# Altium PCB zulu_a7.PcbDoc (part 1 of 3)
Units mm, origin at the board's own origin, x right, y up, seen from the top; angles counter-clockwise.
Board outline 69.85 x 25.4 mm, 6 copper layers (Top Layer, L2-GND, L3-SIG, L4-SIG, L5-VCC3V3, Bottom Layer), stack 1.65 mm thick; 178 components, 177 nets, 839 pads, 377 vias.
Unrouted connection lines stored in the file: 262.
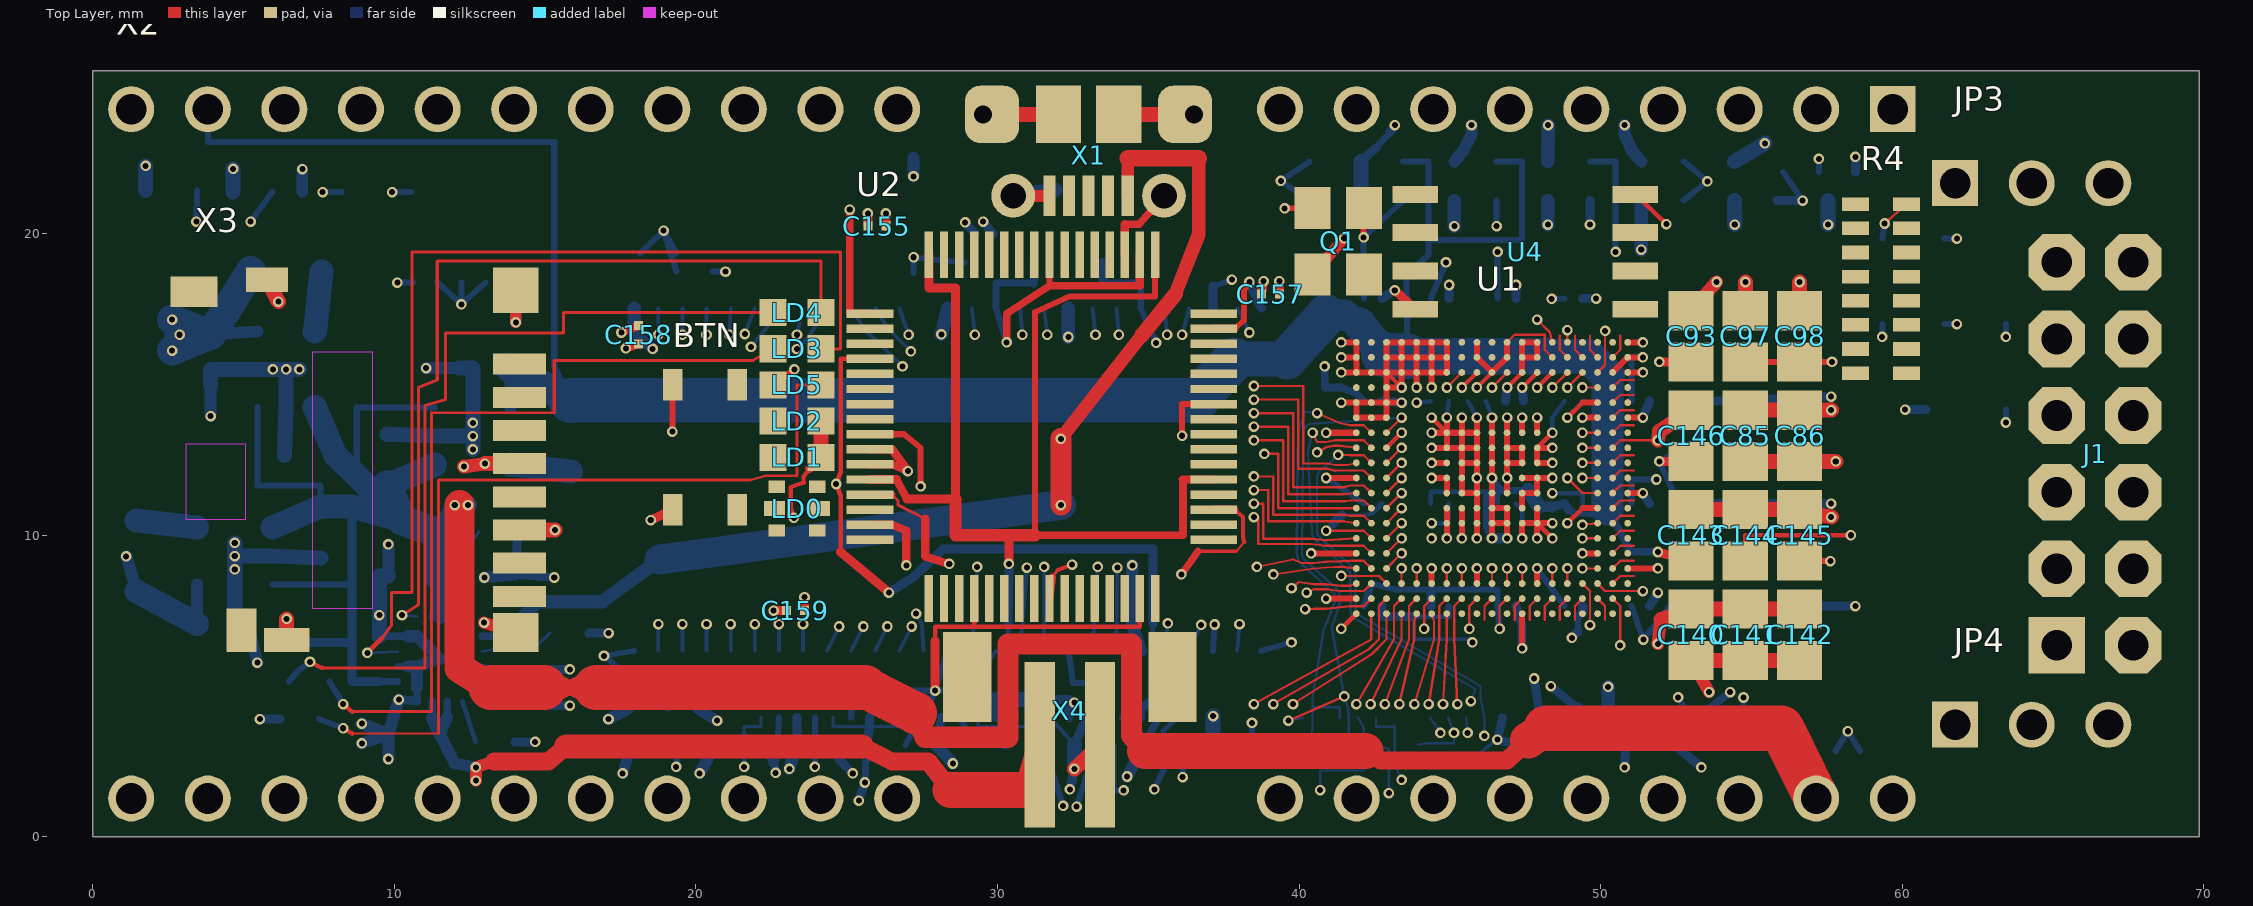
[diagram p0: Top Layer view]
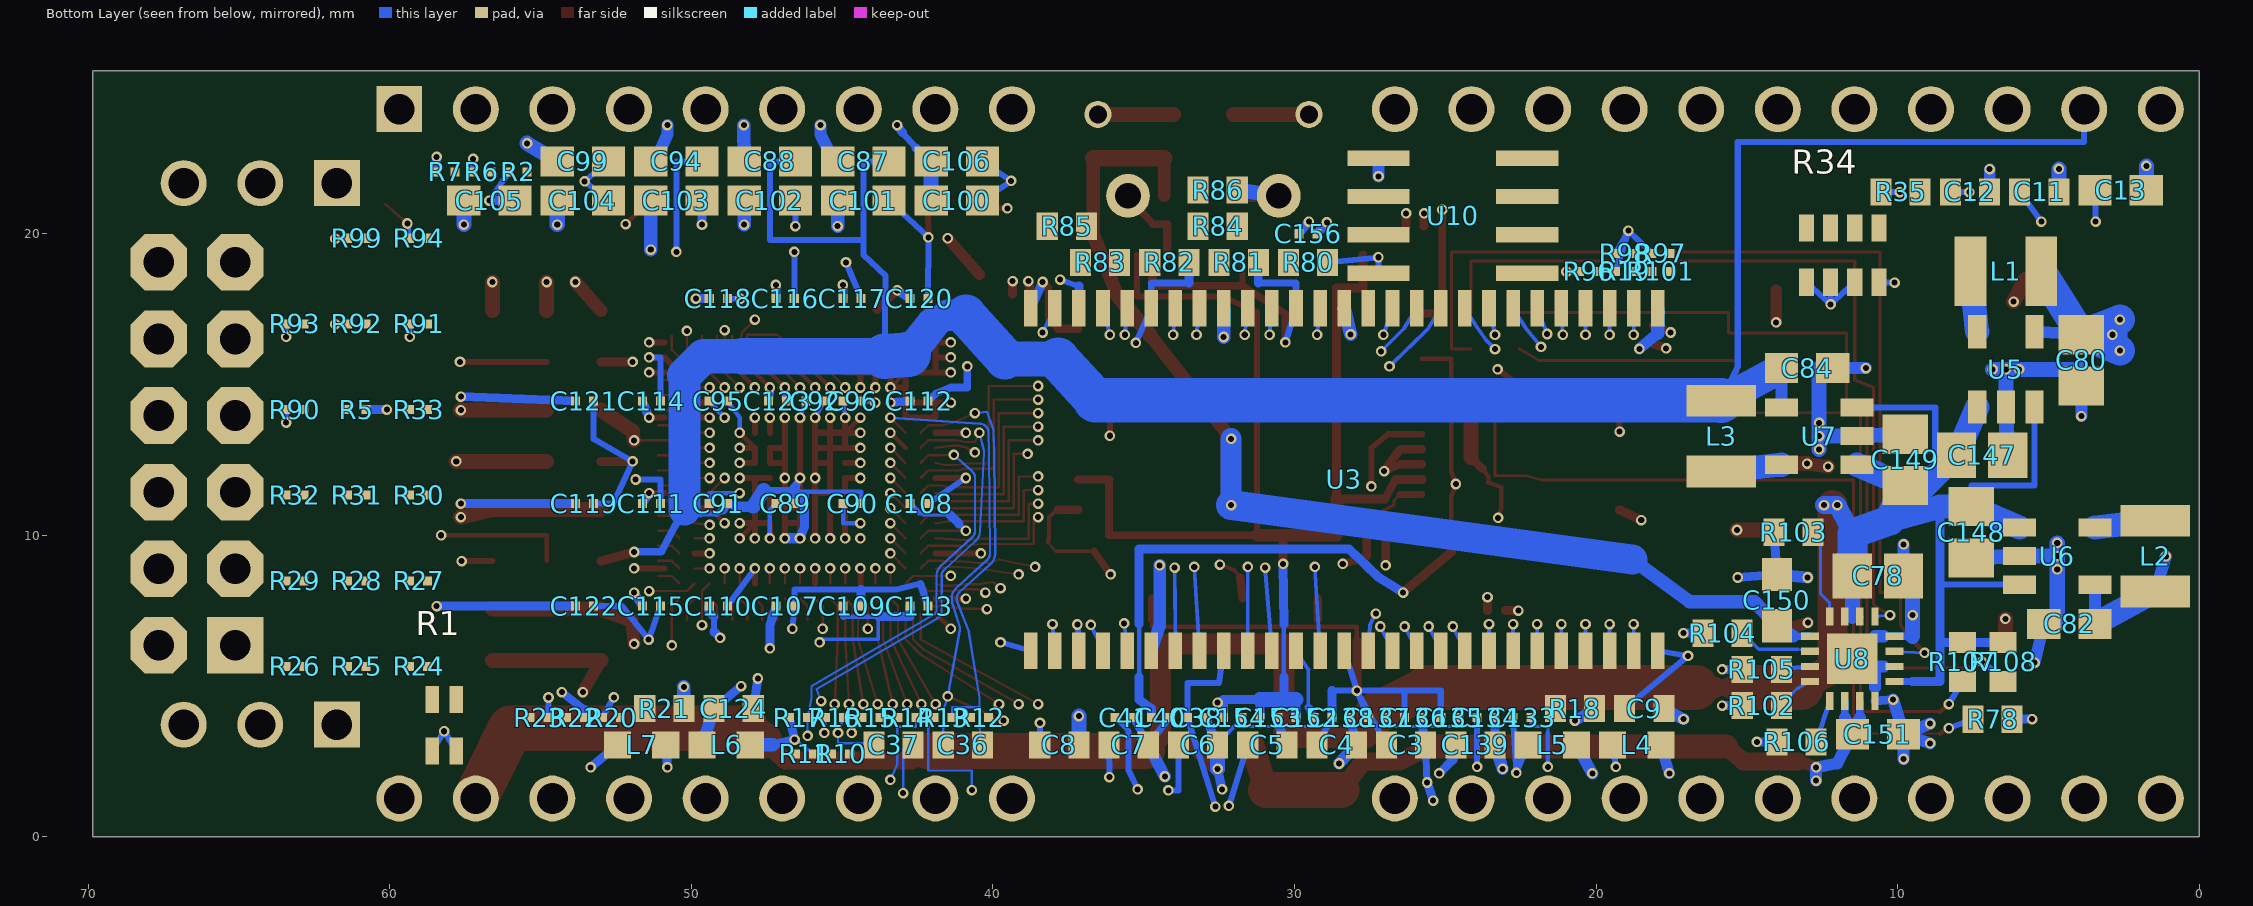
[diagram p1: Bottom Layer view, seen from below]
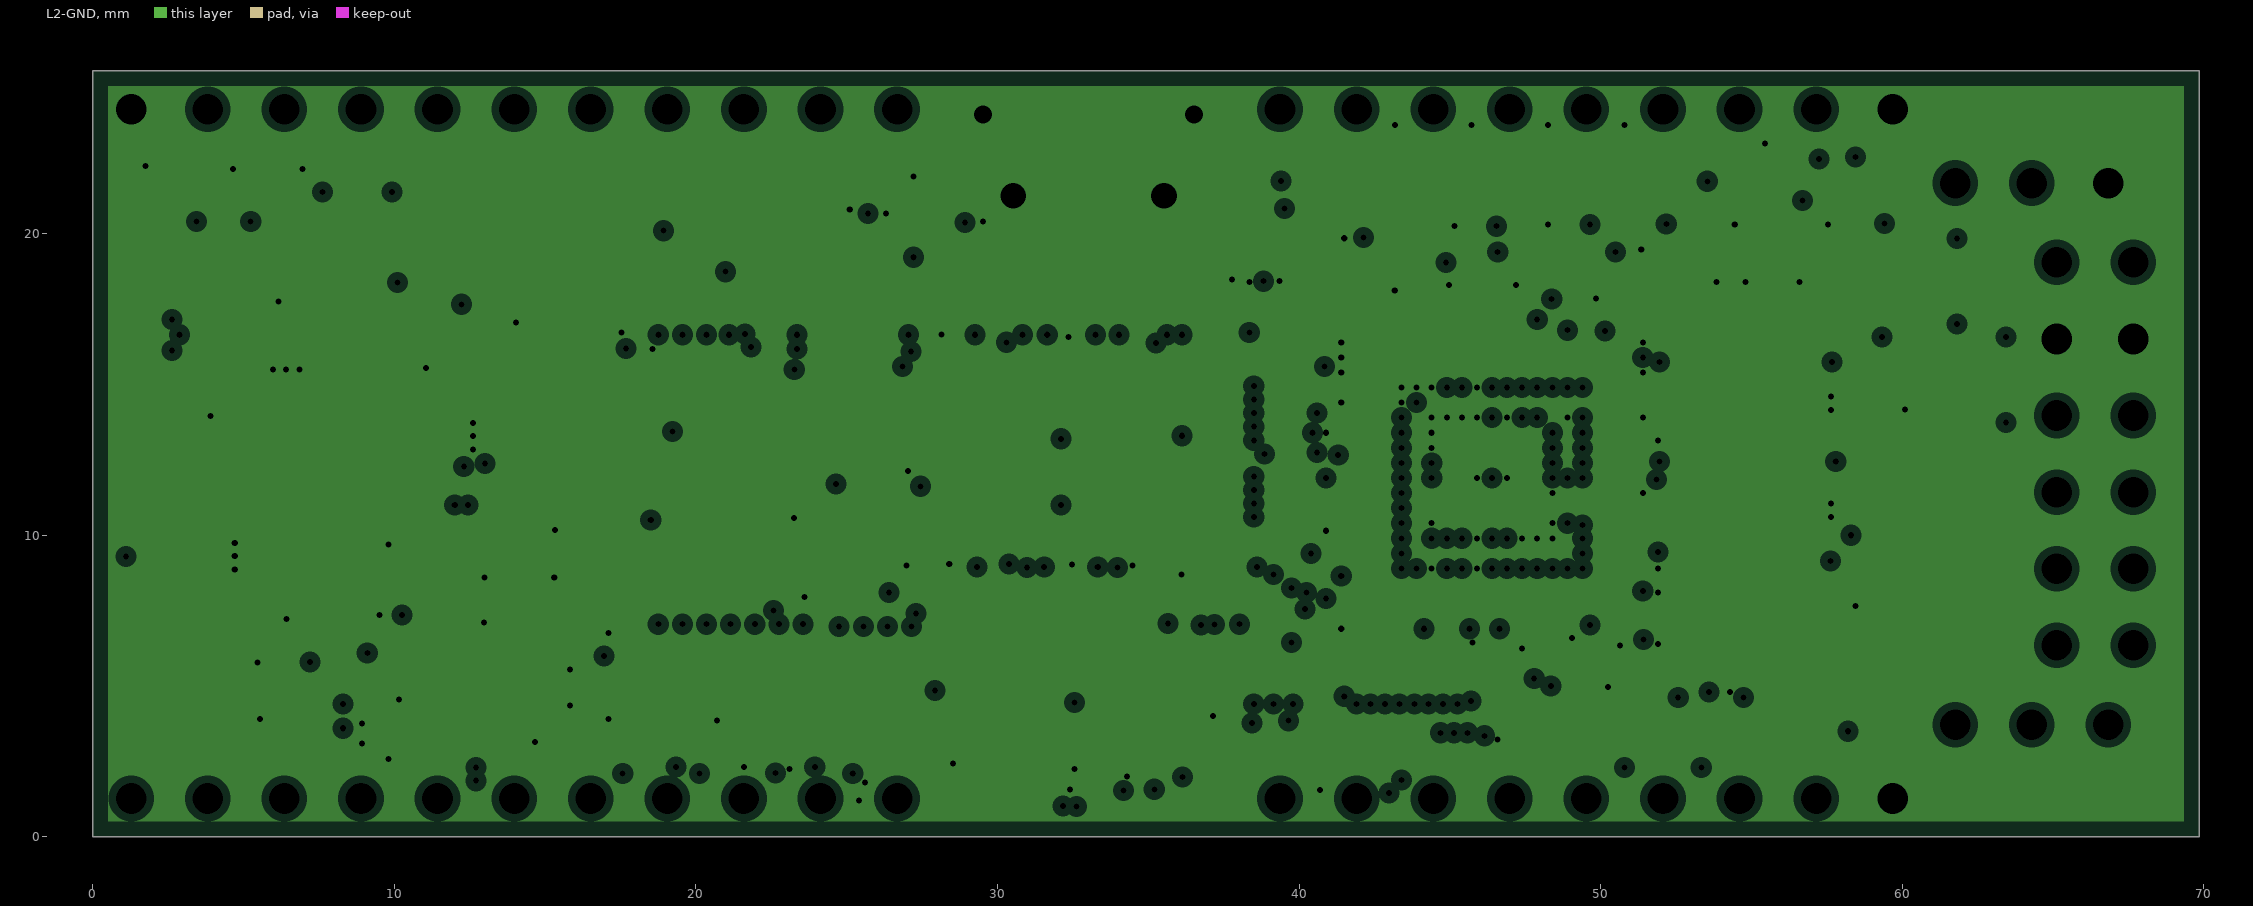
[diagram p2: L2-GND, clearances drawn from the general rule]
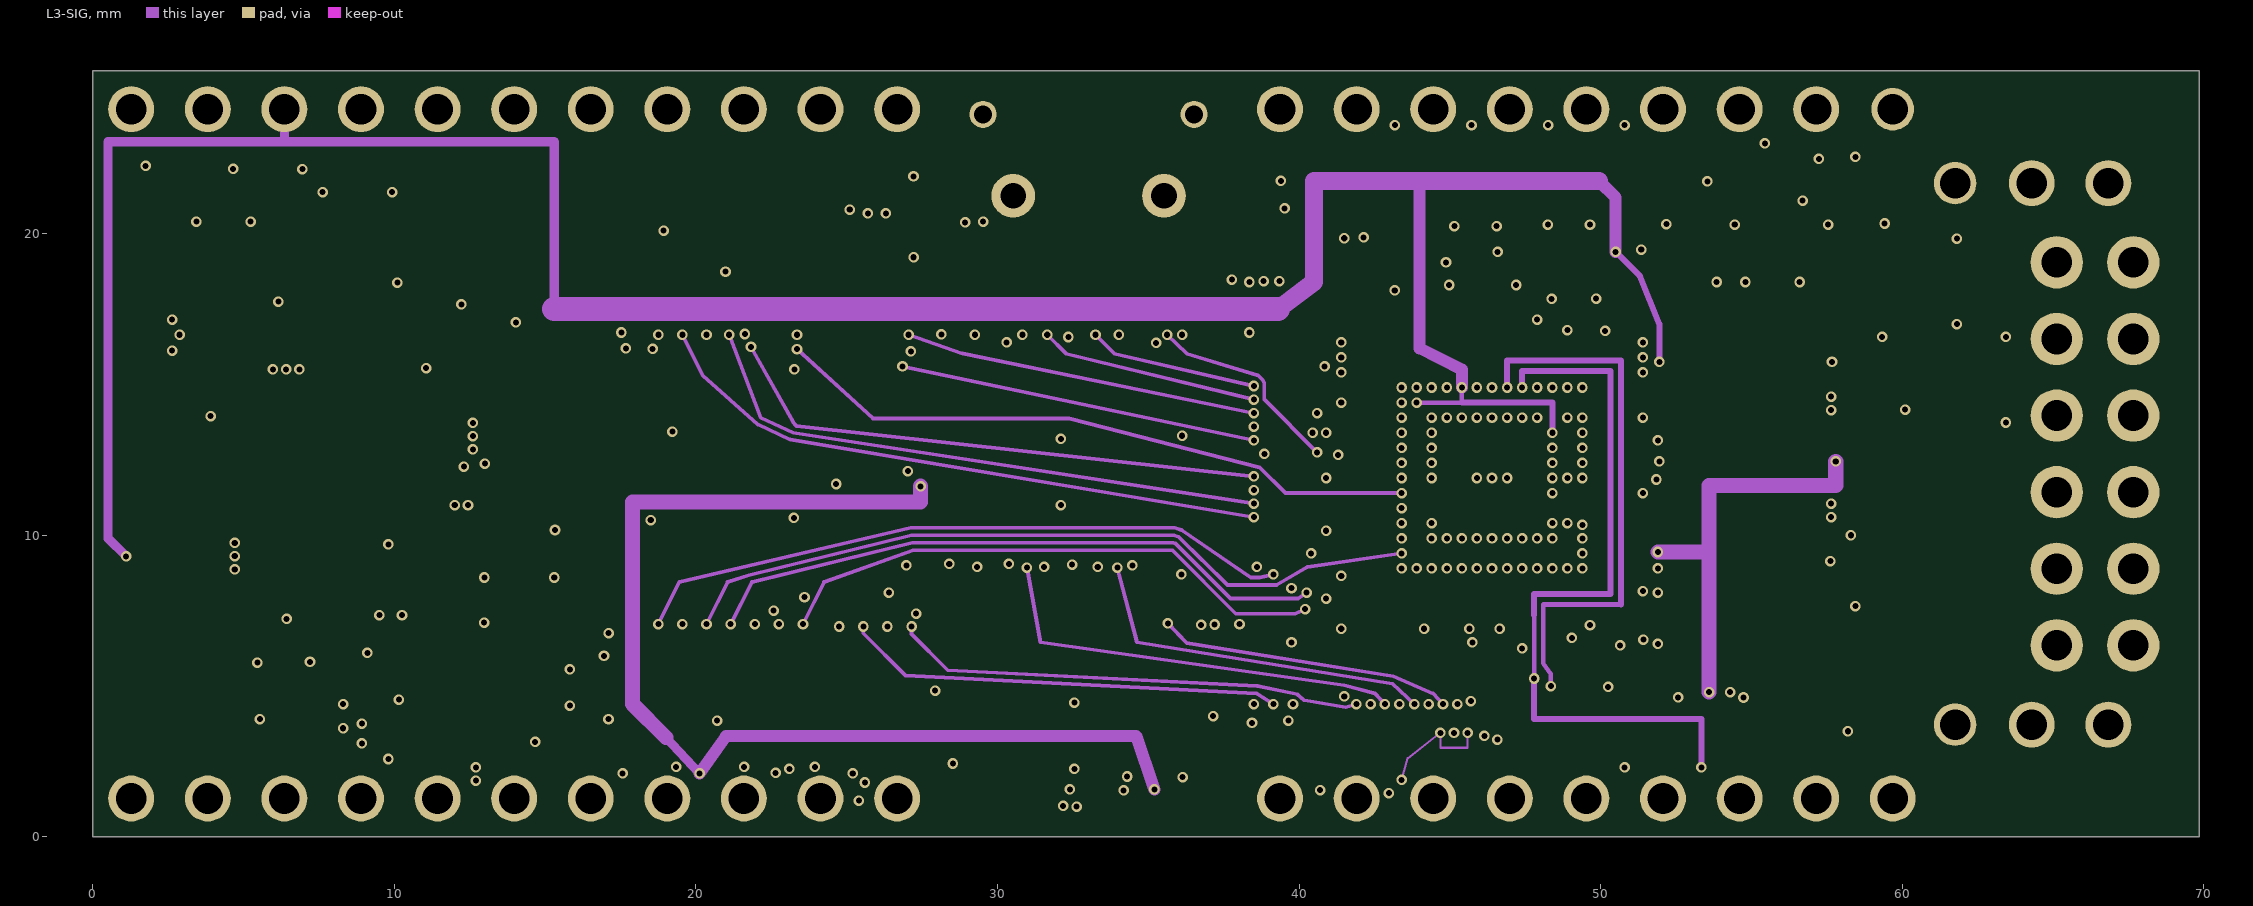
[diagram p3: L3-SIG]
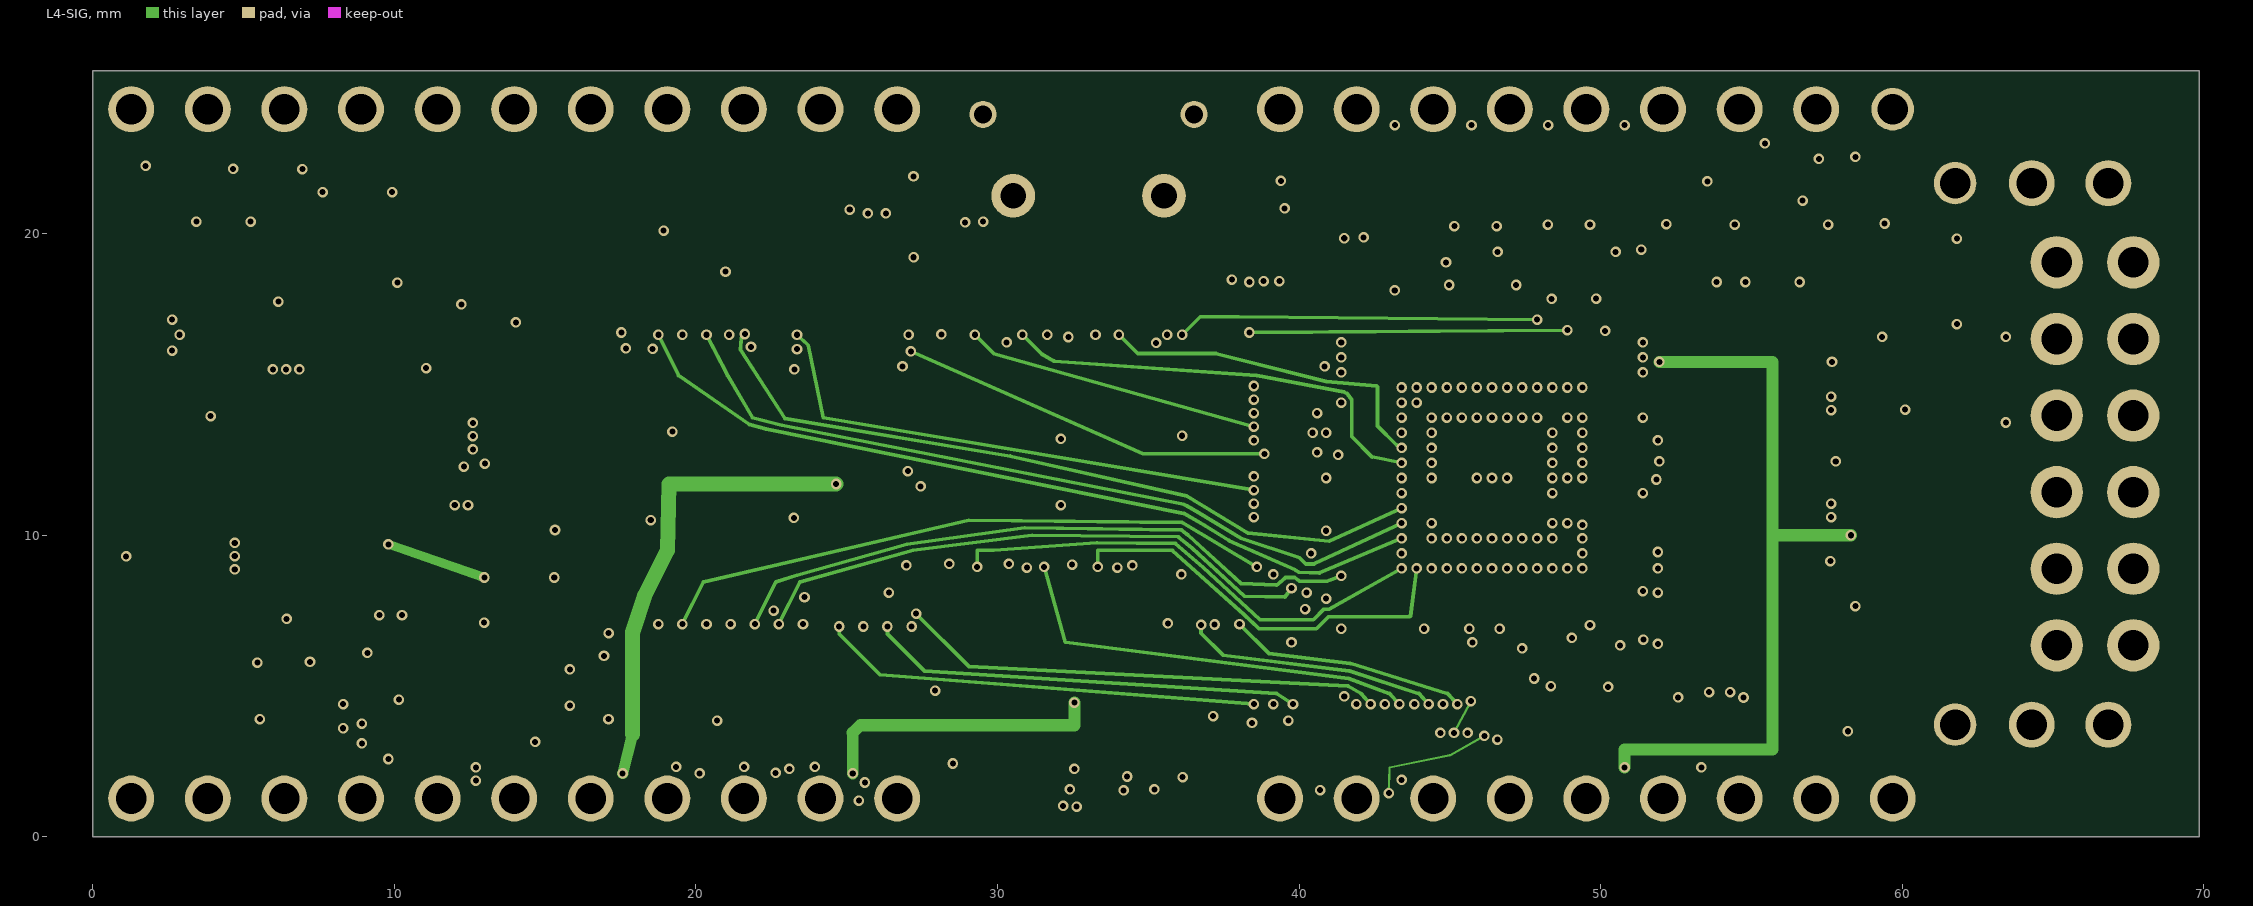
[diagram p4: L4-SIG]
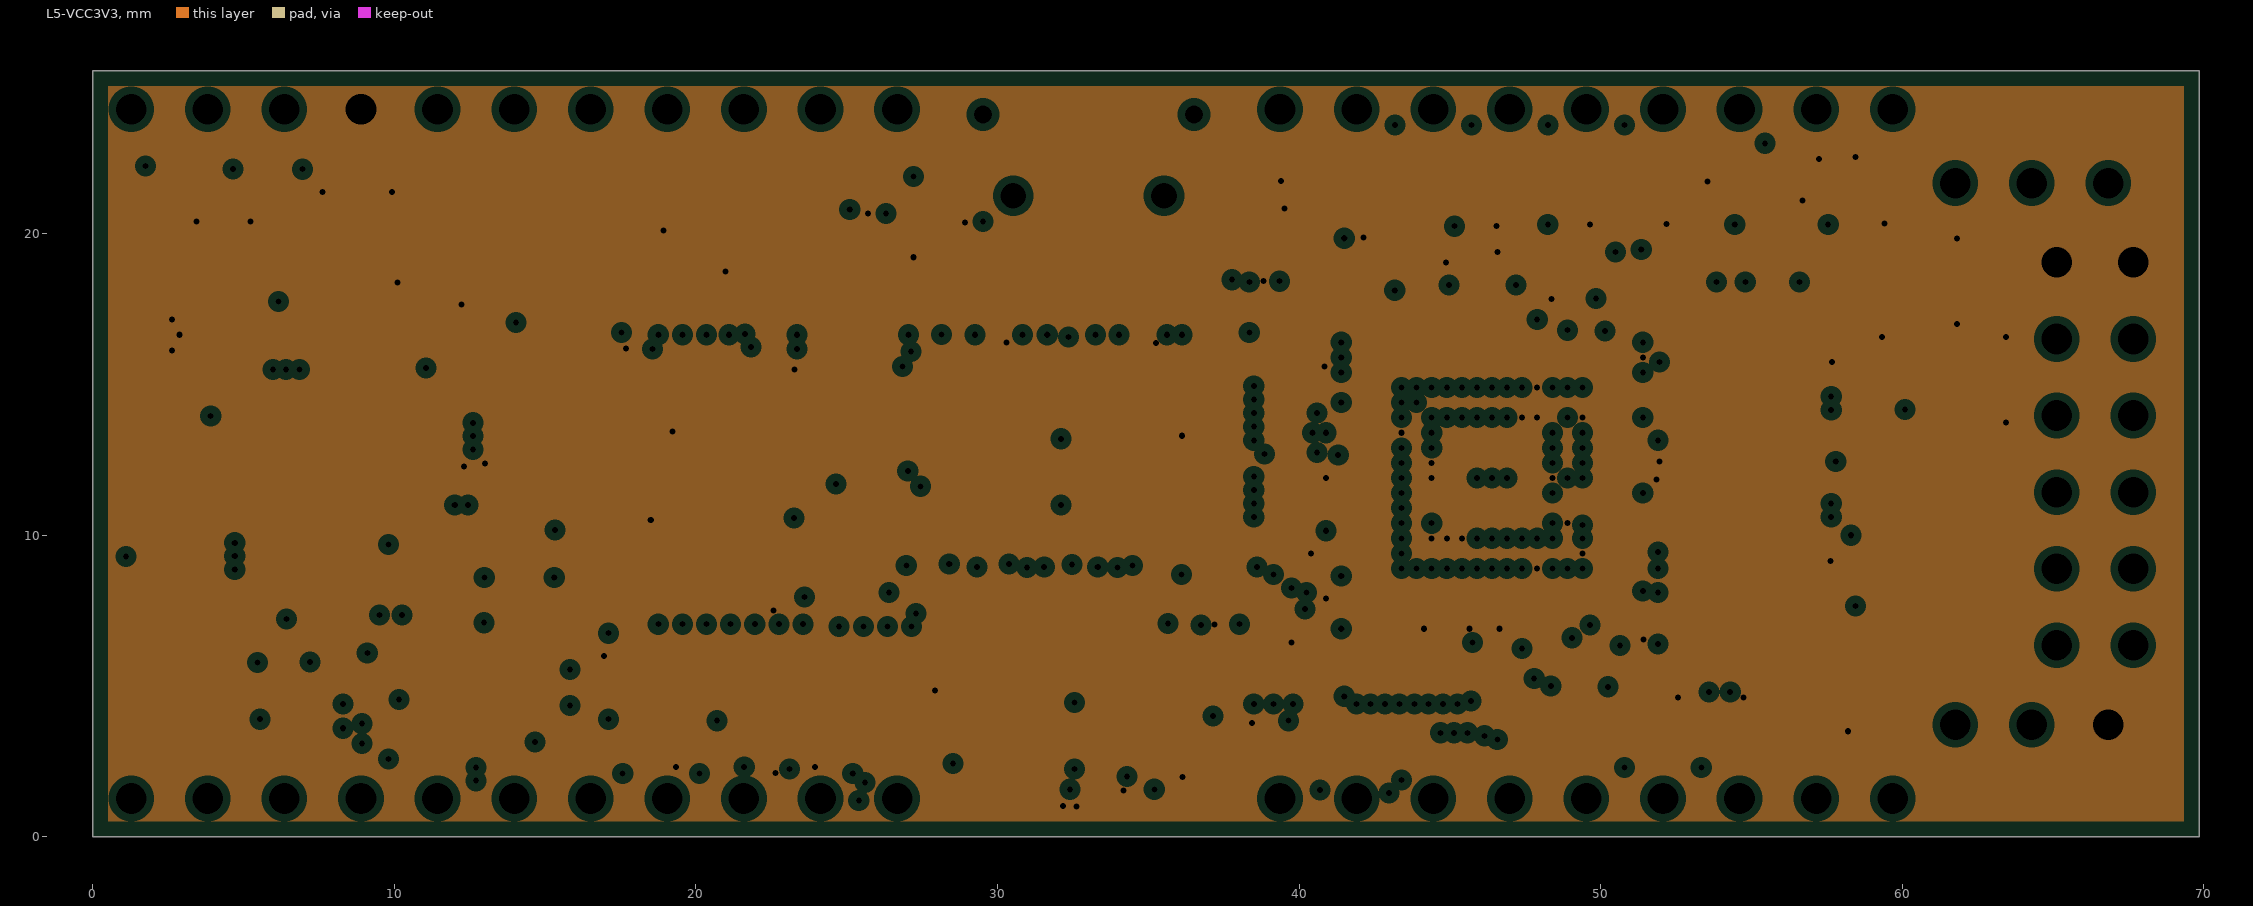
[diagram p5: L5-VCC3V3, clearances drawn from the general rule]

## Layer stack, top to bottom
Top Solder: solder mask 0.0305, Solder Resist, Dk 3.8
Top Layer: signal copper 0.035
Dielectric 2: prepreg 0.0994, PP-006, Dk 4.1
L2-GND: plane copper 0.0152, net GND
Dielectric 4: core 0.1, PP-006, Dk 4.6
L3-SIG: signal copper 0.0152
Dielectric 1: dielectric 1.1208, FR-4, Dk 4.523
L4-SIG: signal copper 0.0152
Dielectric 5: core 0.1, PP-006, Dk 4.6
L5-VCC3V3: plane copper 0.0152, net VCC3V3
Dielectric 3: prepreg 0.0994, PP-006, Dk 4.1
Bottom Layer: signal copper 0.035
Bottom Solder: solder mask 0.0305, Solder Resist, Dk 3.8

## Board outline
0,0 69.85,0 69.85,25.4 0,25.4

## Design rules (kind name [scope] priority, off if disabled: settings)
Clearance Clearance_SDRAM_CLK [InNet('SDRAM-CLK') And (OnLayer('L3-SIG') Or OnLayer('L4-SIG'))] p1: gap=0.2 ignorepadtopadclearanceinfootprint=FALSE
Clearance Clearance_SDRAM_INNER [(InNetClass('SDRAM_DATA') Or InNetClass('SDRAM_ADDR') Or InNetClass('SDRAM_CTRL')) And (OnLayer('L3-SIG') Or OnLayer('L4-SIG'))] p2: gap=0.1 ignorepadtopadclearanceinfootprint=FALSE
Clearance [All] p3: gap=0.09 ignorepadtopadclearanceinfootprint=FALSE
DiffPairsRouting [All] p1: maxlimit=0.15 minlimit=0.15 mostfreqgap=0.15 toplayer_minwidth=0.15 toplayer_maxwidth=0.15 toplayer_prefwidth=0.15 midlayer1_minwidth=0.15 midlayer1_maxwidth=0.15 midlayer1_prefwidth=0.15 midlayer2_minwidth=0.15 midlayer2_maxwidth=0.15 midlayer2_prefwidth=0.15 bottomlayer_minwidth=0.15 bottomlayer_maxwidth=0.15 bottomlayer_prefwidth=0.15 maxuncoupledlength=3
FanoutControl Fanout_BGA [IsBGA] p1: bgadir=Out bgaviamode=Centered fanoutstyle=Auto fanoutdirection=None viagrid=0.025 // Fanout_BGA (Default Rule)
HoleSize HoleSize_uVia [IsMicroVia] p1: absolutevalues=TRUE maxlimit=0.15 minlimit=0.15 maxpercent=80.000 minpercent=20.000
HoleSize HoleSize_Buried [IsBuriedVia] p2: absolutevalues=TRUE maxlimit=0.55 minlimit=0.15 maxpercent=80.000 minpercent=20.000
HoleSize [All] p3: absolutevalues=TRUE maxlimit=1.02 minlimit=0.2 maxpercent=80.000 minpercent=20.000
HoleToHoleClearance [All] p1: gap=0.24 allowstackedmicrovias=TRUE
MinimumSolderMaskSliver [All] p1: minsoldermaskwidth=0.1
PlaneClearance PlaneClearance_uVia [IsMicroVia] p1: clearance=0.165
PlaneClearance [All] p2: clearance=0.25
PlaneConnect PlaneConnect_Vias [IsVia] p1: planeconnectstyle=Direct reliefexpansion=0.508 reliefentries=4 reliefconductorwidth=0.254 reliefairgap=0.254
PlaneConnect [All] p2: planeconnectstyle=Relief reliefexpansion=0.508 reliefentries=4 reliefconductorwidth=0.25 reliefairgap=0.25
PolygonConnect [All] p1: connectstyle=Relief reliefconductorwidth=0.15 reliefentries=4 polygonreliefangle="90 Angle" airgapwidth=0.2
RoutingCorners [All] p1: cornerstyle=45-Degree minsetback=0.1 maxsetback=2.54
RoutingVias RoutingVias_uVia [IsMicroVia] p1: holewidth=0.15 width=0.3 viastyle="Through Hole" minholewidth=0.15 minwidth=0.3 maxholewidth=0.15 maxwidth=0.3
RoutingVias RoutingVias_Buried [IsBuriedVia] p2: holewidth=0.15 width=0.27 viastyle="Through Hole" minholewidth=0.15 minwidth=0.27 maxholewidth=0.15 maxwidth=0.27
RoutingVias [IsThruVia] p3: holewidth=0.2 width=0.35 viastyle="Through Hole" minholewidth=0.2 minwidth=0.35 maxholewidth=0.2 maxwidth=0.35
SolderMaskExpansion SolderMaskExpansion_Vias [IsVia] p1: expansion=0 istentingtop=TRUE useseparateexpansions=TRUE expansionbottom=0 istentingbottom=TRUE
SolderMaskExpansion SolderMaskExpansion_U1 [InComponent('U1')] p2: expansion=0 istentingtop=FALSE
SolderMaskExpansion SolderMaskExpansion_X3 [InComponent('X3')] p3: expansion=0.04 istentingtop=FALSE
SolderMaskExpansion [All] p4: expansion=0.05 istentingtop=FALSE
SupplyNets "Schematic Supply Nets_7" [InNet('VCCADC')] p1: voltage=0.000
SupplyNets "Schematic Supply Nets_6" [InNet('VCC3V3')] p2: voltage=0.000
SupplyNets "Schematic Supply Nets_5" [InNet('VU')] p3: voltage=0.000
SupplyNets "Schematic Supply Nets_4" [InNet('VCC1V8')] p4: voltage=0.000
SupplyNets "Schematic Supply Nets_3" [InNet('GNDADC')] p5: voltage=0.000
SupplyNets "Schematic Supply Nets_2" [InNet('GND')] p6: voltage=0.000
SupplyNets "Schematic Supply Nets_1" [InNet('VCC1V0')] p7: voltage=0.000
SupplyNets "Schematic Supply Nets" [InNet('VBATT')] p8: voltage=0.000
Width Width_SDRAM [InNetClass('SDRAM_DATA') Or InNetClass('SDRAM_ADDR') Or InNetClass('SDRAM_CTRL')] p1: maxlimit=0.15 minlimit=0.076 preferedwidth=0.125 toplayer_prefwidth=0.076 midlayer1_minwidth=0.1 midlayer2_minwidth=0.1 bottomlayer_minwidth=0.1 minimp=50.000000 maximp=50.000000 favimp=50.000000
Width Width_PWR_VCC3V3 [InNet('VCC3V3')] p2: maxlimit=1.5 minlimit=0.076 preferedwidth=1.05 toplayer_prefwidth=0.2 midlayer1_minwidth=1.05 midlayer2_minwidth=1.05 bottomlayer_minwidth=0.2 bottomlayer_prefwidth=0.3 minimp=50.000000 maximp=50.000000 favimp=50.000000
Width Width_PWR_U8 [InNet('VU') Or InNet('USB5V0') Or InNet('VBATT')] p3: maxlimit=1.5 minlimit=0.2 preferedwidth=1.1 toplayer_prefwidth=0.3 midlayer1_minwidth=1.1 midlayer2_minwidth=1.1 bottomlayer_prefwidth=0.2 minimp=50.000000 maximp=50.000000 favimp=50.000000
Width Width_PWR_VCC1V0 [InNet('VCC1V0')] p4: maxlimit=1.5 minlimit=0.15 preferedwidth=0.5 toplayer_prefwidth=0.2 midlayer1_minwidth=0.5 midlayer2_minwidth=0.5 bottomlayer_prefwidth=0.3 minimp=50.000000 maximp=50.000000 favimp=50.000000
Width Width_PWR_SWITCH [InNetClass('PWR_SWITCH')] p5: maxlimit=1.5 minlimit=0.2 preferedwidth=0.5
Width Width_PWR_RAILS [InNetClass('PWR_RAILS')] p6: maxlimit=1 minlimit=0.15 preferedwidth=0.3 toplayer_prefwidth=0.2 midlayer1_prefwidth=0.2 midlayer2_prefwidth=0.2 minimp=50.000000 maximp=50.000000 favimp=50.000000
Width [All] p7: maxlimit=0.5 minlimit=0.076 preferedwidth=0.076
22 further rules are at their usual default settings.

## Classes and differential pairs
net class PWR_SWITCH: NetL1_1 NetL2_1 NetL3_1
net class SDCARD: SD-CLK SD-CMD SD-DAT0 SD-DAT1 SD-DAT2 SD-DAT3
net class JTAG: FPGA-TCK FPGA-TDI FPGA-TDO FPGA-TMS TCK TDI TDO TMS
net class CFG_FLASH: CFG-M0 CFG-M1 CFG-M2 DONE DONE-PU FLASH-CS# FLASH-D00 FLASH-D01 FLASH-D02 FLASH-D03 FPGA-CCLK FPGA-DONE FPGA-INIT# PROG# PUDC_B
net class CLOCKS: CHAN-CLK CLK-12M-FPGA CLK-12M-FT CLK-12M-SHARED SDRAM-CLK
net class USB_DATA: USB_D_N USB_D_P
net class SDRAM_CTRL: CAS# CKE LDQM RAS# SDRAM-CLK SDRAM-CS# UDQM WE#
net class SDRAM_DATA: D0 D1 D2 D3 D4 D5 D6 D7 D8 D9 D10 D11 D12 D13 D14 D15
net class SDRAM_ADDR: A0 A1 A2 A3 A4 A5 A6 A7 A8 A9 A10 A11 A12 BS0 BS1
net class PWR_RAILS: FT-VCORE FT-VPHY FT-VPLL USB5V0 VBATT VCC1V0 VCC1V8 VCC3V3 VCCADC VU
component class zulu_a7_6: C85 C86 C87 C88 C89 C90 C91 C92 C93 C94 C95 C96 C97 C98 C99 C100 C101 C102 C103 C104 C105 C106 C107 C108 C109 C110 C111 C112 C113 C114 C115 C116 C117 C118 C119 C120 C121 C122 C140 C141 C142 C143 C144 C145 C146 U1
component class zulu_a7_5: C123 C124 L6 L7 R20 R21 R22 R23
component class zulu_a7_4: C38 C40 C41 C133 C134 C135 C136 C137 C138 C139 C152 C153 C154 JP3 JP4 L4 L5 Q1 R1 R4 R5 R18 R19 R24 R25 R90 R91 R92 R93 R94 R96 R97 R98 R99 R101 U2 U10
component class zulu_a7_3: C3 C4 C5 C6 C7 C8 C9 C11 C12 C13 C155 C156 C157 C158 C159 R2 R6 R7 R34 R35 U3 U4 X3
component class zulu_a7_2: BTN C36 C37 J1 LD0 LD1 LD2 R10 R11 R12 R13 R14 R15 R16 R17 R26 R27 R28 R29 R30 R31 R32 R33 R80 R81 R82 R83 R84 R85 R86 U$2 U$3 U$4 U$5 X2
component class zulu_a7_1: C78 C80 C82 C84 C147 C148 C149 C150 C151 L1 L2 L3 LD3 LD4 LD5 R78 R102 R103 R104 R105 R106 R107 R108 U5 U6 U7 U8 X1 X4
differential pair USB: +USB_D_P -USB_D_N

## Components (designator, comment, footprint, x,y, rotation, side; value= is the part's Value field where it differs from the comment)
BTN "PTS810" PTS810 20.3,12.92 r90 top
C3 "0.1uF" C0402 26.3,3.05 r0 bottom
C4 "0.1uF" C0402 28.6,3.05 r0 bottom
C5 "0.1uF" C0402 30.9,3.05 r0 bottom
C6 "0.1uF" C0402 33.2,3.05 r0 bottom
C7 "0.1uF" C0402 35.5,3.05 r0 bottom
C8 "0.1uF" C0402 37.8,3.05 r0 bottom
C9 "0.1uF" C0402 18.4,4.25 r0 bottom
C11 "0.1uF" C0402 5.3,21.39 r0 bottom
C12 "0.1uF" C0402 7.6,21.39 r0 bottom
C13 "10uF" C0603 2.6,21.44 r0 bottom
C36 "1nF" C0402 41,3.05 r0 bottom
C37 "1nF" C0402 43.3,3.05 r0 bottom
C38 "0.01uF" C0201 33.249,3.95 r0 bottom
C40 "100nF" C0201 34.449,3.95 r0 bottom
C41 "100nF" C0201 35.649,3.95 r0 bottom
C78 "10uF 10V" C0805 10.65,8.651 r0 bottom
C80 "22uF" C0805 3.906,15.802 r90 bottom
C82 "22uF" C0603 4.304,7.058 r180 bottom
C84 "22uF" C0603 13,15.542 r0 bottom
C85 "22uF" C0805 54.8,13.299 r90 top
C86 "22uF" C0805 56.6,13.299 r90 top
C87 "4.7uF" C0603 44.3,22.4 r0 bottom
C88 "4.7uF" C0603 47.4,22.4 r0 bottom
C89 "0.47uF" C0201 46.89,11.05 r0 bottom
C90 "0.47uF" C0201 44.67,11.05 r0 bottom
C91 "0.47uF" C0201 49.11,11.05 r0 bottom
C92 "0.47uF" C0201 45.9,14.45 r180 bottom
C93 "22uF" C0805 53,16.599 r90 top
C94 "4.7uF" C0603 50.499,22.4 r0 bottom
C95 "0.47uF" C0201 49.11,14.45 r0 bottom
C96 "0.47uF" C0201 44.67,14.45 r0 bottom
C97 "22uF" C0805 54.8,16.599 r90 top
C98 "22uF" C0805 56.6,16.599 r90 top
C99 "4.7uF" C0603 53.599,22.4 r0 bottom
C100 "4.7uF" C0603 41.2,21.1 r0 bottom
C101 "4.7uF" C0603 44.3,21.1 r0 bottom
C102 "4.7uF" C0603 47.4,21.1 r0 bottom
C103 "4.7uF" C0603 50.499,21.1 r0 bottom
C104 "4.7uF" C0603 53.599,21.1 r0 bottom
C105 "4.7uF" C0603 56.699,21.1 r0 bottom
C106 "4.7uF" C0603 41.2,22.4 r0 bottom
C107 "0.47uF" C0201 46.89,7.65 r0 bottom
C108 "0.47uF" C0201 42.45,11.05 r0 bottom
C109 "0.47uF" C0201 44.67,7.65 r0 bottom
C110 "0.47uF" C0201 49.11,7.65 r0 bottom
C111 "0.47uF" C0201 51.33,11.05 r0 bottom
C112 "0.47uF" C0201 42.45,14.45 r0 bottom
C113 "0.47uF" C0201 42.45,7.65 r0 bottom
C114 "0.47uF" C0201 51.33,14.45 r0 bottom
C115 "0.47uF" C0201 51.33,7.65 r0 bottom
C116 "0.47uF" C0201 46.89,17.85 r0 bottom
C117 "0.47uF" C0201 44.67,17.85 r0 bottom
C118 "0.47uF" C0201 49.11,17.85 r0 bottom
C119 "0.47uF" C0201 53.55,11.05 r0 bottom
C120 "0.47uF" C0201 42.45,17.85 r0 bottom
C121 "0.47uF" C0201 53.55,14.45 r0 bottom
C122 "0.47uF" C0201 53.55,7.65 r0 bottom
C123 "100nF" C0201 47.15,14.45 r180 bottom
C124 "470nF" C0402 48.6,4.25 r0 bottom
C133 "0.1uF" C0201 22.45,3.95 r0 bottom
C134 "0.1uF" C0201 23.65,3.95 r0 bottom
C135 "0.1uF" C0201 24.85,3.95 r0 bottom
C136 "0.1uF" C0201 26.05,3.95 r0 bottom
C137 "0.1uF" C0201 27.25,3.95 r0 bottom
C138 "0.1uF" C0201 28.45,3.95 r0 bottom
C139 "4.7uF" C0402 24,3.05 r0 bottom
C140 "22uF" C0805 53,6.7 r90 top
C141 "22uF" C0805 54.8,6.7 r90 top
C142 "22uF" C0805 56.6,6.7 r90 top
C143 "22uF" C0805 53,10 r90 top
C144 "22uF" C0805 54.8,10 r90 top
C145 "22uF" C0805 56.6,10 r90 top
C146 "22uF" C0805 53,13.299 r90 top
C147 "10uF" C0805 7.198,12.651 r0 bottom
C148 "10uF" C0805 7.555,10.1 r90 bottom
C149 "10uF" C0805 9.748,12.5 r270 bottom
C150 "4.7uF" C0603 14.002,7.85 r270 bottom
C151 "4.7uF" C0603 10.65,3.398 r0 bottom
C152 "0.1uF" C0201 29.649,3.95 r0 bottom
C153 "0.1uF" C0201 30.849,3.95 r0 bottom
C154 "0.1uF" C0201 32.049,3.95 r0 bottom
C155 "0.1uF" C0201 26,20.25 r180 top
C156 "0.1uF" C0201 29.55,20 r180 bottom
C157 "0.1uF" C0201 39.05,18 r180 top
C158 "0.1uF" C0201 18.1,16.65 r270 top
C159 "0.1uF" C0201 23.3,7.5 r180 top
J1 "Pmod 2x6" 2X06 66.4,12.7 r90 top
JP3 "JTAG TCK/TMS/GND" 1X03-NOSILK 64.3,21.68 r0 top
JP4 "JTAG TDI/TDO/3V3" 1X03-NOSILK 64.3,3.72 r0 top
L1 "1.5uH" IND2520 6.408,18.754 r180 bottom
L2 "1.5uH" IND2520 1.452,9.31 r270 bottom
L3 "1.5uH" IND2520 15.851,13.29 r90 bottom
L4 "FB 600R" IND0603 18.65,3.05 r0 bottom
L5 "FB 600R" IND0603 21.45,3.05 r0 bottom
L6 "FB 600R" IND0603 48.85,3.05 r0 bottom
L7 "FB 600R" IND0603 51.65,3.05 r0 bottom
LD0 "EAST1616RGBA8" EVERLIGHT-19-337 23.35,10.885 r0 top
LD1 "red" LED0603 23.35,12.585 r0 top
LD2 "red" LED0603 23.35,13.785 r0 top
LD3 "green" LED0603 23.35,16.185 r0 top
LD4 "red" LED0603 23.35,17.385 r0 top
LD5 "green" LED0603 23.35,14.985 r0 top
Q1 "12MHz 10ppm (FPGA + FT2232HL)" 32X25 40.45,20.85 r0 top
R1 "4.7K" 742C043 58.2,3.7 r0 bottom
R2 "4.7K" R0201 55.749,22.05 r0 bottom
R4 "100" 742C163 59.3,18.178 r90 top
R5 "5.1K" R0201 61.1,14.17 r0 bottom
R6 "4.7K" R0201 56.949,22.05 r0 bottom
R7 "4.7K" R0201 58.149,22.05 r0 bottom
R10 "2.32K" R0201 45.05,2.75 r0 bottom
R11 "1K" R0201 46.25,2.75 r0 bottom
R12 "140" R0201 40.45,3.95 r0 bottom
R13 "845" R0201 41.65,3.95 r0 bottom
R14 "2.32K" R0201 42.85,3.95 r0 bottom
R15 "1K" R0201 44.05,3.95 r0 bottom
R16 "140" R0201 45.25,3.95 r0 bottom
R17 "845" R0201 46.45,3.95 r0 bottom
R18 "12K 1%" R0402 20.7,4.25 r0 bottom
R19 "10K" R0201 19.05,18.75 r0 bottom
R20 "1K" R0201 52.65,3.95 r0 bottom
R21 "1K" R0402 50.9,4.25 r0 bottom
R22 "1K" R0201 53.85,3.95 r0 bottom
R23 "1K" R0201 55.05,3.95 r0 bottom
R24 "33" R0201 59.05,5.65 r0 bottom
R25 "33" R0201 61.1,5.65 r0 bottom
R26 "200" R0201 63.15,5.65 r0 bottom
R27 "200" R0201 59.05,8.49 r0 bottom
R28 "200" R0201 61.1,8.49 r0 bottom
R29 "200" R0201 63.15,8.49 r0 bottom
R30 "200" R0201 59.05,11.33 r0 bottom
R31 "200" R0201 61.1,11.33 r0 bottom
R32 "200" R0201 63.15,11.33 r0 bottom
R33 "200" R0201 59.05,14.17 r0 bottom
R34 "4.7K" 742C083 11.02,19.29 r0 bottom
R35 "4.7K" R0402 9.9,21.39 r0 bottom
R78 "680" R0402 6.85,3.9 r0 bottom
R80 "33" R0402 29.55,19.05 r0 bottom
R81 "330" R0402 31.85,19.05 r0 bottom
R82 "33" R0402 34.15,19.05 r0 bottom
R83 "330" R0402 36.45,19.05 r0 bottom
R84 "330" R0402 32.55,20.25 r0 bottom
R85 "10K" R0402 37.55,20.25 r0 bottom
R86 "10K" R0402 32.55,21.45 r0 bottom
R90 "10K" R0201 63.15,14.17 r0 bottom
R91 "10K" R0201 59.05,17.01 r0 bottom
R92 "10K" R0201 61.1,17.01 r0 bottom
R93 "10K" R0201 63.15,17.01 r0 bottom
R94 "10K" R0201 59.05,19.85 r0 bottom
R96 "10k" R0201 20.25,18.75 r0 bottom
R97 "10k" R0201 17.85,19.35 r0 bottom
R98 "10k" R0201 19.05,19.35 r0 bottom
R99 "4.7k" R0201 61.1,19.85 r0 bottom
R101 "2.21k" R0201 17.85,18.75 r0 bottom
R102 "3.57K" R0402 14.501,4.349 r180 bottom
R103 "3.09K" R0402 13.45,10.1 r180 bottom
R104 "56.2K" R0402 15.803,6.752 r180 bottom
R105 "4.32K" R0402 14.501,5.55 r180 bottom
R106 "10K" R0402 13.351,3.147 r180 bottom
R107 "1.5K" R0402 7.85,5.8 r90 bottom
R108 "1.5K" R0402 6.5,5.8 r90 bottom
U1 "XC7A35T-1CPG236C" XC7A35T-CPG236 41.9,16.4 r0 top
U2 "FT2232HL USB-UART/JTAG Bridge" FT2232HL-LQFP64 31.475,13.6 r0 top
U3 "AS4C32M16SB-7TCN" TSOPII-54 38.75,6.17 r90 bottom
U4 "W25Q128JVSIQ" SOIC-8_208MIL 43.551,21.305 r0 top
U5 "SC189ZSKTRT" SOT23-5 6.408,15.502 r180 bottom
U6 "SC189LSKTRT" SOT23-5 4.704,9.31 r270 bottom
U7 "SC189ASKTRT" SOT23-5 12.6,13.29 r90 bottom
U8 "BQ24232 LiPo charger + power path" VQFN16-3X3-RGT 11.5,5.9 r90 bottom
U10 "93LC46BT-I/SN" SPI-8_SOIC_150 22.285,18.695 r0 bottom
U$2 "CC_CC" CC_CC 5.059,-6.441 r0 top
U$3 "CC_BY" CC_BY 10.895,-7.722 r0 top
U$4 "CC_SA" CC_SA 15.451,-7.722 r0 top
U$5 "CC_COPYRIGHT" CC_COPYRIGHT 21.288,-6.441 r0 top
X1 "Molex 105017-0001 Micro-USB-B" MOLEX-105017-0001 33.02,21.258 r0 top
X2 "ZULU-CONN" ZULU-DIP37 0,0 r0 top
X3 "DM3D-SF" DM3D-SF 8.8,12.475 r90 top
X4 "JST PH 2-pin, 1S LiPo" JST-B2B-PH-SM4-TB 32.4,5.3 r0 top

## Footprints (in the part's own frame and the unit in brackets; to place one, negate y for a bottom-side part, rotate by r counter-clockwise, add the part's x,y. Pads: shape width x height; smd on the part's side, far side on the other; paste and mask are expansions set on the pad)
1X03-NOSILK [mil] "1X03-NOSILK"
  rect 60x60 / inner round 55.43 / far side rect 60x60 hole 40: 1(-100,0)
  round 60 hole 40: 2(0,0) 3(100,0)
2X06 [mil] "2X06"
  rect 74x74 / inner round 68.37 / far side rect 74x74 hole 40: 1(-250,50)
  oct 74x74 / inner round 68.37 / far side oct 74x74 hole 40: 2(-150,50) 3(-50,50) 4(50,50) 5(150,50) 6(250,50) 7(-250,-50) 8(-150,-50) 9(-50,-50) 10(50,-50) 11(150,-50) 12(250,-50)
32X25 [mm] "32X25"
  rect 1.2x1.4 smd: 1(0,0) 2(0,-2.2) 3(1.7,-2.2) 4(1.7,0)
742C043 [mm] "742C043"
  rect 0.45x0.9 smd: 1(-0.4,-0.85) 2(0.4,-0.85) 3(0.4,0.85) 4(-0.4,0.85)
742C083 [mm] "742C083"
  rect 0.5x0.9 smd: 1(-0.4,-0.9) 2(0.4,-0.9) 3(1.2,-0.9) 4(2,-0.9) 5(2,0.9) 6(1.2,0.9) 7(0.4,0.9) 8(-0.4,0.9)
742C163 [mm] "742C163"
  rect 0.45x0.9 smd: 1(-2.8,-0.85) 2(-2,-0.85) 3(-1.2,-0.85) 4(-0.4,-0.85) 5(0.4,-0.85) 6(1.2,-0.85) 7(2,-0.85) 8(2.8,-0.85) 9(2.8,0.85) 10(2,0.85) 11(1.2,0.85) 12(0.4,0.85) 13(-0.4,0.85) 14(-1.2,0.85) 15(-2,0.85) 16(-2.8,0.85)
C0201 [mm] "C0201"
  rect 0.3x0.3 smd: 1(-0.3,0) 2(0.3,0)
C0402 [mm] "C0402"
  rect 0.7x0.9 smd: 1(-0.65,0) 2(0.65,0)
C0603 [mm] "C0603"
  rect 1.1x1 smd: 1(-0.85,0) 2(0.85,0)
C0805 [mm] "C0805"
  rect 1.3x1.5 smd: 1(-0.85,0) 2(0.85,0)
CC_BY [mm] "CC_BY"
CC_CC [mm] "CC_CC"
CC_COPYRIGHT [mm] "CC_COPYRIGHT"
CC_SA [mm] "CC_SA"
DM3D-SF [mm] "DM3D-SF"
  rect 0.7x1.75 smd: 1(3.2,-5.35) 2(2.1,-5.35) 3(1,-5.35) 4(-0.1,-5.35) 5(-1.2,-5.35) 6(-2.3,-5.35) 7(-3.4,-5.35) 8(-4.5,-5.35)
  rect 1x1.55 smd: A(5.6,5.45)
  rect 1.45x1 smd: B(-5.625,3.875)
  rect 1.3x1.5 smd: G1(-5.7,-5.225)
  rect 0.8x1.5 smd: G2(-5.95,2.375)
  rect 0.8x1.4 smd: G3(6,3.025)
  rect 1.5x1.5 smd: G4(5.65,-5.225)
EVERLIGHT-19-337 [mm] "EVERLIGHT-19-337"
  rect 0.55x0.4 smd: 1(0.675,0.725) 2(-0.675,0.725) 5(0.675,-0.725) 6(-0.675,-0.725)
  rect 0.7x0.5 smd: 3(0.75,0) 4(-0.75,0)
FT2232HL-LQFP64 [mm] "FT2232HL-LQFP64"
  rect 1.55x0.28 smd: 1(-5.7,3.75) 2(-5.7,3.25) 3(-5.7,2.75) 4(-5.7,2.25) 5(-5.7,1.75) 6(-5.7,1.25) 7(-5.7,0.75) 8(-5.7,0.25) 9(-5.7,-0.25) 10(-5.7,-0.75) 11(-5.7,-1.25) 12(-5.7,-1.75) 13(-5.7,-2.25) 14(-5.7,-2.75) 15(-5.7,-3.25) 16(-5.7,-3.75) 33(5.7,-3.75) 34(5.7,-3.25) 35(5.7,-2.75) 36(5.7,-2.25) 37(5.7,-1.75) 38(5.7,-1.25) 39(5.7,-0.75) 40(5.7,-0.25) 41(5.7,0.25) 42(5.7,0.75) 43(5.7,1.25) 44(5.7,1.75) 45(5.7,2.25) 46(5.7,2.75) 47(5.7,3.25) 48(5.7,3.75)
  rect 0.28x1.55 smd: 17(-3.75,-5.7) 18(-3.25,-5.7) 19(-2.75,-5.7) 20(-2.25,-5.7) 21(-1.75,-5.7) 22(-1.25,-5.7) 23(-0.75,-5.7) 24(-0.25,-5.7) 25(0.25,-5.7) 26(0.75,-5.7) 27(1.25,-5.7) 28(1.75,-5.7) 29(2.25,-5.7) 30(2.75,-5.7) 31(3.25,-5.7) 32(3.75,-5.7) 49(3.75,5.7) 50(3.25,5.7) 51(2.75,5.7) 52(2.25,5.7) 53(1.75,5.7) 54(1.25,5.7) 55(0.75,5.7) 56(0.25,5.7) 57(-0.25,5.7) 58(-0.75,5.7) 59(-1.25,5.7) 60(-1.75,5.7) 61(-2.25,5.7) 62(-2.75,5.7) 63(-3.25,5.7) 64(-3.75,5.7)
IND0603 [mil] "IND0603"
  rect 35.43x35.43 smd: 1(-31.5,0) 2(31.5,0)
IND2520 [mm] "IND2520"
  rect 1.05x2.3 smd: 1(-1.175,0) 2(1.175,0)
JST-B2B-PH-SM4-TB [mm] "JST-B2B-PH-SM4-TB"
  rect 1x5.5 smd: 1(-1,-2.25) 2(1,-2.25)
  rect 1.6x3 smd: MP1(-3.4,0) MP2(3.4,0)
LED0603 [mil] "LED0603"
  rect 35.43x35.43 smd: A(-31.5,0) K(31.5,0)
MOLEX-105017-0001 [mm] "MOLEX-105017-0001"
  rect 0.4x1.35 smd: 1(1.3,0) 2(0.65,0) 3(0,0) 4(-0.65,0) 5(-1.3,0)
  round 1.45 hole 0.85: MH1(-2.5,0) MH2(2.5,0)
  rrect56% 1.8x1.9 smd: MP1(-3.2,2.7) MP4(3.2,2.7)
  rect 1.5x1.9 smd: MP2(-1,2.7) MP3(1,2.7)
  round 0.9 hole 0.6: MS1(-3.5,2.7) MS2(3.5,2.7)
PTS810 [mm] "PTS810"
  rect 1.05x0.65 smd: 1(-2.075,1.075) 2(2.075,1.075) 3(-2.075,-1.075) 4(2.075,-1.075)
R0201 [mm] "R0201"
  rect 0.3x0.3 smd: 1(-0.3,0) 2(0.3,0)
R0402 [mm] "R0402"
  rect 0.7x0.9 smd: 1(-0.65,0) 2(0.65,0)
SOIC-8_208MIL [mm] "SOIC-8_208MIL"
  rect 1.51x0.56 smd: 1(0.299,0) 2(0.299,-1.27) 3(0.299,-2.54) 4(0.299,-3.81) 5(7.599,-3.81) 6(7.599,-2.54) 7(7.599,-1.27) 8(7.599,0)
SOT23-5 [mm] "SOT23-5"
  rect 0.6x1.1 smd: 1(-0.95,-1.25) 2(0,-1.25) 3(0.95,-1.25) 4(0.95,1.25) 5(-0.95,1.25)
SPI-8_SOIC_150 [mil] "SPI-8_SOIC_150"
  rect 81.5x20.08 smd: 1(0,0) 2(0,-50) 3(0,-100) 4(0,-150) 5(194.09,-150) 6(194.09,-100) 7(194.09,-50) 8(194.09,0)
TSOPII-54 [mm] "TSOPII-54"
  rect 1.2x0.45 smd: 1(0,0) 2(0,-0.8) 3(0,-1.6) 4(0,-2.4) 5(0,-3.2) 6(0,-4) 7(0,-4.8) 8(0,-5.6) 9(0,-6.4) 10(0,-7.2) 11(0,-8) 12(0,-8.8) 13(0,-9.6) 14(0,-10.4) 15(0,-11.2) 16(0,-12) 17(0,-12.8) 18(0,-13.6) 19(0,-14.4) 20(0,-15.2) 21(0,-16) 22(0,-16.8) 23(0,-17.6) 24(0,-18.4) 25(0,-19.2) 26(0,-20) 27(0,-20.8) 28(11.36,-20.8) 29(11.36,-20) 30(11.36,-19.2) 31(11.36,-18.4) 32(11.36,-17.6) 33(11.36,-16.8) 34(11.36,-16) 35(11.36,-15.2) 36(11.36,-14.4) 37(11.36,-13.6) 38(11.36,-12.8) 39(11.36,-12) 40(11.36,-11.2) 41(11.36,-10.4) 42(11.36,-9.6) 43(11.36,-8.8) 44(11.36,-8) 45(11.36,-7.2) 46(11.36,-6.4) 47(11.36,-5.6) 48(11.36,-4.8) 49(11.36,-4) 50(11.36,-3.2) 51(11.36,-2.4) 52(11.36,-1.6) 53(11.36,-0.8) 54(11.36,0)
VQFN16-3X3-RGT [mm] "VQFN16-3X3-RGT"
  rect 0.6x0.24 smd: 1(-1.4,0.75) 2(-1.4,0.25) 3(-1.4,-0.25) 4(-1.4,-0.75) 9(1.4,-0.75) 10(1.4,-0.25) 11(1.4,0.25) 12(1.4,0.75)
  rect 0.24x0.6 smd: 5(-0.75,-1.4) 6(-0.25,-1.4) 7(0.25,-1.4) 8(0.75,-1.4) 13(0.75,1.4) 14(0.25,1.4) 15(-0.25,1.4) 16(-0.75,1.4)
  rect 1.68x1.68 smd: 17(0,0)
XC7A35T-CPG236 [mm] "XC7A35T-CPG236"
  rrect100% 0.225x0.225 smd: A1(0,0) A2(0.5,0) A3(1,0) A4(1.5,0) A5(2,0) A6(2.5,0) A7(3,0) A8(3.5,0) A9(4,0) A10(4.5,0) A11(5,0) A12(5.5,0) A13(6,0) A14(6.5,0) A15(7,0) A16(7.5,0) A17(8,0) A18(8.5,0) A19(9,0) B1(0,-0.5) B2(0.5,-0.5) B3(1,-0.5) B4(1.5,-0.5) B5(2,-0.5) B6(2.5,-0.5) B7(3,-0.5) B8(3.5,-0.5) B9(4,-0.5) B10(4.5,-0.5) B11(5,-0.5) B12(5.5,-0.5) B13(6,-0.5) B14(6.5,-0.5) B15(7,-0.5) B16(7.5,-0.5) B17(8,-0.5) B18(8.5,-0.5) B19(9,-0.5) C1(0,-1) C2(0.5,-1) C3(1,-1) C4(1.5,-1) C5(2,-1) C6(2.5,-1) C7(3,-1) C8(3.5,-1) C9(4,-1) C10(4.5,-1) C11(5,-1) C12(5.5,-1) C13(6,-1) C14(6.5,-1) C15(7,-1) C16(7.5,-1) C17(8,-1) C18(8.5,-1) C19(9,-1) D1(0,-1.5) D2(0.5,-1.5) D3(1,-1.5) D17(8,-1.5) D18(8.5,-1.5) D19(9,-1.5) E1(0,-2) E2(0.5,-2) E3(1,-2) E17(8,-2) E18(8.5,-2) E19(9,-2) F1(0,-2.5) F2(0.5,-2.5) F3(1,-2.5) F17(8,-2.5) F18(8.5,-2.5) F19(9,-2.5) G1(0,-3) G2(0.5,-3) G3(1,-3) G7(3,-3) G8(3.5,-3) G9(4,-3) G10(4.5,-3) G11(5,-3) G12(5.5,-3) G13(6,-3) G17(8,-3) G18(8.5,-3) G19(9,-3) H1(0,-3.5) H2(0.5,-3.5) H3(1,-3.5) H7(3,-3.5) H8(3.5,-3.5) H9(4,-3.5) H10(4.5,-3.5) H11(5,-3.5) H12(5.5,-3.5) H13(6,-3.5) H17(8,-3.5) H18(8.5,-3.5) H19(9,-3.5) J1(0,-4) J2(0.5,-4) J3(1,-4) J7(3,-4) J8(3.5,-4) J9(4,-4) J10(4.5,-4) J11(5,-4) J12(5.5,-4) J13(6,-4) J17(8,-4) J18(8.5,-4) J19(9,-4) K1(0,-4.5) K2(0.5,-4.5) K3(1,-4.5) K7(3,-4.5) K8(3.5,-4.5) K12(5.5,-4.5) K13(6,-4.5) K17(8,-4.5) K18(8.5,-4.5) K19(9,-4.5) L1(0,-5) L2(0.5,-5) L3(1,-5) L7(3,-5) L8(3.5,-5) L9(4,-5) L10(4.5,-5) L11(5,-5) L12(5.5,-5) L13(6,-5) L17(8,-5) L18(8.5,-5) L19(9,-5) M1(0,-5.5) M2(0.5,-5.5) M3(1,-5.5) M7(3,-5.5) M8(3.5,-5.5) M9(4,-5.5) M10(4.5,-5.5) M11(5,-5.5) M12(5.5,-5.5) M13(6,-5.5) M17(8,-5.5) M18(8.5,-5.5) M19(9,-5.5) N1(0,-6) N2(0.5,-6) N3(1,-6) N7(3,-6) N8(3.5,-6) N9(4,-6) N10(4.5,-6) N11(5,-6) N12(5.5,-6) N13(6,-6) N17(8,-6) N18(8.5,-6) N19(9,-6) P1(0,-6.5) P2(0.5,-6.5) P3(1,-6.5) P17(8,-6.5) P18(8.5,-6.5) P19(9,-6.5) R1(0,-7) R2(0.5,-7) R3(1,-7) R17(8,-7) R18(8.5,-7) R19(9,-7) T1(0,-7.5) T2(0.5,-7.5) T3(1,-7.5) T17(8,-7.5) T18(8.5,-7.5) T19(9,-7.5) U1(0,-8) U2(0.5,-8) U3(1,-8) U4(1.5,-8) U5(2,-8) U6(2.5,-8) U7(3,-8) U8(3.5,-8) U9(4,-8) U10(4.5,-8) U11(5,-8) U12(5.5,-8) U13(6,-8) U14(6.5,-8) U15(7,-8) U16(7.5,-8) U17(8,-8) U18(8.5,-8) U19(9,-8) V1(0,-8.5) V2(0.5,-8.5) V3(1,-8.5) V4(1.5,-8.5) V5(2,-8.5) V6(2.5,-8.5) V7(3,-8.5) V8(3.5,-8.5) V9(4,-8.5) V10(4.5,-8.5) V11(5,-8.5) V12(5.5,-8.5) V13(6,-8.5) V14(6.5,-8.5) V15(7,-8.5) V16(7.5,-8.5) V17(8,-8.5) V18(8.5,-8.5) V19(9,-8.5) W1(0,-9) W2(0.5,-9) W3(1,-9) W4(1.5,-9) W5(2,-9) W6(2.5,-9) W7(3,-9) W8(3.5,-9) W9(4,-9) W10(4.5,-9) W11(5,-9) W12(5.5,-9) W13(6,-9) W14(6.5,-9) W15(7,-9) W16(7.5,-9) W17(8,-9) W18(8.5,-9) W19(9,-9)
ZULU-DIP37 [mil] "ZULU-DIP37"
  rect 60x60 / inner round 55.43 / far side rect 60x60 hole 40: 1(2350,950)
  round 60 hole 40: 2(2250,950) 3(2150,950) 4(2050,950) 5(1950,950) 6(1850,950) 7(1750,950) 8(1650,950) 9(1550,950) 10(1050,950) 11(950,950) 12(850,950) 13(750,950) 14(650,950) 15(550,950) 16(450,950) 17(350,950) 18(250,950) 19(150,950) 20(50,950) 21(2350,50) 22(2250,50) 23(2150,50) 24(2050,50) 25(1950,50) 26(1850,50) 27(1750,50) 28(1650,50) 29(1550,50) 30(1050,50) 31(950,50) 32(850,50) 33(750,50) 34(650,50) 35(550,50) 36(450,50) 37(350,50) 38(250,50) 39(150,50) 40(50,50)

## Part data
BTN: library part SWITCH_TACT, "Tactile switch, momentary, normally open. Package PTA-142 is assigned and drawn from the datasheet land; the note that said otherwise was left behind when it was.", DeviceSetName=SWITCH_TACT, GateName_1=G$1, LibraryName=ctambe, MANF="Littelfuse (C&K)", MANF#="PTS810SJM250SMTR LFS", NOTE="PTS810SJM250SMTR LFS, Littelfuse (C&K) PTS810 series, Datasheet/Littelfuse-CK-Tactile-PTS810-Series-Datasheet.pdf rev 02/02/26. Recommended PCB layout (p1): four pads (5.2 - 3.1)/2 = 1.05 mm wide by (2.8 - 1.5)/2 = 0.65 mm high, centred at +-2.075 mm and +-1.075 mm; body 4.2 x 3.2 mm, J-leads to 4.6 mm, height 2.5 mm. The datasheet schematic joins 1 with 2 and 3 with 4, so pins 1,2 (VCC3V3) and 3,4 (BTN) are unchanged. Footprint PTS810 to be drawn at the PCB stage; the PTA-142 pattern (1.6 mm pads at +-3.75 / +-1.4 mm) does not fit. Other force grades on the same pads: K 2.6 N, G 4.0 N, S 6.0 N. Digi-Key 106,352 in stock at $0.58, 16-week lead (2026-09-08); LCSC C116501 dry, the K grade C221896 stocked.", SPEC="tactile switch SPST-NO momentary, SMT J-lead, 4.2 x 3.2 x 2.5 mm, 1.6 N (160 gf), 0.15 mm travel, 150000 cycles, 16 VDC 50 mA, -40..85 C; terminals 1-2 and 3-4 internally common (PTS810 sheet p1); replaced the unsourceable PTA-142 on 2026-09-08", SymbolName_1=SWITCH_TACT
C3 C4 C5 C6 C7 C8 C9 C11 C12 C36 C37 C139: library part C-GENERICC0402, "CAPACITOR, generic non-polarized, horizontal pins", DeviceName=C0402, DeviceSetName=C-GENERIC, GateName_1=G$1, LibraryName=rcl, SymbolName_1=C-GENERIC-H
  C3 C4 C5 C6 C7 C8 C9 C11 C12: MANF=Murata, MANF#=GRM155R71C104KA88D, SPEC="X7R 16V +-10%, 0.50 mm max"
  C36 C37: MANF=Murata, MANF#=GRM155R71H102KA01D, SPEC="X7R 50V +-10%, 0.50 mm max"
  C139: MANF="Taiyo Yuden", MANF#=MSASJ105BB5475MFNA01, SPEC="X5R 6.3V +-20% 0402 4.7uF, 0.65 mm max, about 3.7 uF left at 1.8 V; Digi-Key alias JMK105BBJ475MV-F (587-2787-1-ND, 1.6 M pcs); replaced the unobtainable 3.3 uF GRM155R60J335ME15D on the FT2232H VCORE node (FTDI minimum 3.3 uF) on 2026-09-08"
C13 C82 C84 C150 C151: library part C-GENERICC0603, "CAPACITOR, generic non-polarized, horizontal pins", DeviceName=C0603, DeviceSetName=C-GENERIC, GateName_1=G$1, LibraryName=rcl, SymbolName_1=C-GENERIC-H
  C13: MANF=Murata, MANF#=GRM188R60J106ME47D, SPEC="X5R 6.3V +-20%, 0.90 mm max"
  C82 C84: MANF=Samsung, MANF#=CL10A226MP8NUNE, SPEC="X5R 10V +-20% 0603 22uF, 1.05 mm max (T 0.80 +-0.25); replaced the 6.3 V Murata GRM188R60J226MEA0D (1.00 mm max, dry until 2027) on 2026-09-07"
  C150 C151: MANF=Murata, MANF#=GRM188R61C475KE11D, SPEC="X5R 16V +-10% 0603 4.7uF, 0.95 mm max (bq24232 IN/BAT bypass, datasheet 1-10 uF on IN and 4.7-47 uF on BAT)"
C38 C40 C41 C133 C134 C135 C136 C137 C138 C152 C153 C154 C155 C156 C157 C158 C159: library part C-GENERICC0201, "CAPACITOR, generic non-polarized, horizontal pins", DeviceName=C0201, DeviceSetName=C-GENERIC, GateName_1=G$1, LibraryName=rcl, MANF=Murata, SymbolName_1=C-GENERIC-H
  C38: MANF#=GRM033R71E103KE14D, NOTE="0402 -> 0201 on U2's support. 50V drops to 25V, which is still far over what a 3.3V rail needs -- the 50V part was over-specified. Confirm the MPN suffix before ordering.", SPEC="X7R 25V +-10%, 0.30 mm max"
  C40 C41 C133 C134 C135 C136 C137 C138: MANF#=GRM033R61A104KE15D, NOTE="0402 -> 0201 on U2's support. The DIELECTRIC AND VOLTAGE BOTH CHANGE: X7R 16V becomes X5R 10V, because 0201 at this capacitance is an X5R part. X5R narrows the temperature range to -55..+85 C from X7R's +125, which suits this board but is not a like-for-like swap. At 0.1 uF the DC bias derating is mild, unlike the 0.47 uF on sheet 7. Confirm the MPN suffix against Murata's data before ordering.", SPEC="X5R 10V +-10%, 0.30 mm max"
  C152 C153 C154: MANF#=GRM033R61A104KE15D, NOTE="FT2232H core-rail decoupling. DS_FT2232H Figures 4.1 and 6.1 show a 100 nF at each VCORE pin besides the 4.7 uF bulk (C39, C139); the board had the bulk and none of these. Same part as the eight 0.1 uF and 100 nF 0201 capacitors already on this sheet, so no new BOM line. AT LAYOUT: put one beside each of pins 12, 37 and 64 with the shortest ground return you can manage -- that placement is the whole point of them.", SPEC="X5R 10V +-10% 0201 0.1uF, 0.30 mm max -- one per FT2232H VCORE pin, added 2026-09-09 after docs/connectivity_check.md found the core rail carrying bulk only"
  C155 C156 C157 C158 C159: MANF#=GRM033R61A104KE15D, NOTE="RETURN-PATH STITCHING FOR THE L5 PLANE, NOT DECOUPLING.  L5 carries VCC3V3 and L2 carries GND, so a signal via that moves between an L2-referenced layer (Top, L3) and an L5-referenced one (L4, Bottom) has nowhere for its return current to go except through a VCC3V3-to-GND capacitor.  Fifty-two vias on this board do that and thirty-nine of them are the AS4C32M16SB bus; before these five parts the nearest such capacitor was a median of 3.30 mm and up to 12.70 mm away, because all forty-six sit in the y 3.0-4.2 row, round U1, or at x 2.6-7.6, and none was anywhere in x 12-39, y 6-25.4.  These five fill that hole: C155 (26.000,20.250) Top carries UDQM, CKE and A12; C156 (29.550,20.000) Bottom carries D10 and D11; C157 (39.050,18.000) Top carries D13 and is also the best path for D3 and D6; C158 (18.100,16.650) Top carries the west address row A5, A7, A9; C159 (23.300,7.500) Top carries the south control row BS0, RAS#, A0, A1, which had the worst return paths on the board.  THEIR VALUE IS IN THE PLACEMENT AND IN THE TWO VIAS BESIDE EACH ONE, NOT IN THE CAPACITANCE: with roughly 2 nH of mounting inductance a 100 nF 0201 self-resonates near 11 MHz, so at the 143 MHz bus clock and above the capacitance is irrelevant and the impedance is set entirely by the loop -- the unavoidable barrel across the 1.3512 mm L2-to-L5 cavity plus the pad-to-via tie, which is the one term a layout can shorten.  Each of these five is tied to its two planes by its own dedicated via 0.85-1.07 mm of copper away, against a 2.43 mm median for the other forty-six.  DO NOT move these parts, do not re-route or lengthen their stubs, do not delete either via, and do not substitute a larger case size: a 0402 would push the vias apart and undo the point.  If the value must change, smaller is better than larger.  Coordinates and the full measurement are in docs/stage5b_stitching_caps.md.", SPEC="X5R 10V +-10% 0201 0.1uF, 0.30 mm max -- VCC3V3-to-GND return-path stitch for the L5 plane change, added 2026-09-24"
C78 C80 C147 C148 C149: library part C-GENERICC0805, "CAPACITOR, generic non-polarized, horizontal pins", DeviceName=C0805, DeviceSetName=C-GENERIC, GateName_1=G$1, LibraryName=rcl, SymbolName_1=C-GENERIC-H
  C78 C147 C148 C149: MANF=Samsung, MANF#=CL21A106KPFNNNG, SPEC="X5R 10V +-10% 0805 10uF; replaces the obsolete Murata GRM21BR61A106KE19L"
  C80: MANF=Murata, MANF#=GRM21BR61A226ME44L, SPEC="X5R 10V +-20%, 1.45 mm max -- SC189 COUT on VCC3V3, sense pin 4 lands here"
C85 C86 C93 C97 C98 C140 C141 C142 C143 C144 C145 C146: library part C-USC0805, "CAPACITOR, American symbol", DeviceName=C0805, DeviceSetName=C-US, GateName_1=G$1, LibraryName=rcl, MANF=Murata, MANF#=GRM21BR61A226ME44L, SPEC="X5R 10V +-20%, 1.45 mm max", SymbolName_1=C-US
  C141 C142 C143 C144 C145 C146: NOTE="Second half of a bulk position: each 47uF 1206 became two 22uF 0805. Nominal drops 47 -> 44 uF per position, but the 0805 is 10V where the 1206 was 6.3V, so it derates less under bias and the pair should deliver at least what the single part did. Height also drops 1.60 -> 1.45 mm max, which the back-side budget against the 2.54 mm header standoff cares about."
C87 C88 C94 C99 C100 C101 C102 C103 C104 C105 C106: library part C-USC0603, "CAPACITOR, American symbol", DeviceName=C0603, DeviceSetName=C-US, GateName_1=G$1, LibraryName=rcl, MANF=Murata, MANF#=GRM188R61C475KE11D, SPEC="X5R 16V +-10% 0603 4.7uF, 0.95 mm max; 10 V grades (KE15D obsolete, KAAJD NRND) replaced by the 16 V one on 2026-09-08", SymbolName_1=C-US
C89 C90 C91 C92 C95 C96 C107 C108 C109 C110 C111 C112 C113 C114 C115 C116 C117 C118 C119 C120 C121 C122 C123: library part C-USC0201, "CAPACITOR, American symbol", DeviceName=C0201, DeviceSetName=C-US, GateName_1=G$1, LibraryName=rcl, MANF=Murata, SymbolName_1=C-US
  C89 C90 C91 C92 C95 C96 C107 C108 C109 C110 C111 C112 C113 C114 C115 C116 C117 C118 C119 C120 C121 C122: MANF#=GRM033R60J474KE90D, NOTE="0402 -> 0201 to cut ESL, following Cmod A7. THE VOLTAGE RATING DROPS 16V to 6.3V and that costs real capacitance: on VCC3V3 a 6.3V 0201 sits at 52 percent of rating and DC bias typically removes 60-75 percent of it, against 15-25 percent for the 16V 0402 it replaces. The BOM value is unchanged, so validate.py's UG483 count still passes -- it counts nominal values and cannot see bias derating. Effective decoupling on 3V3 is roughly half what it was. Confirm the MPN suffix and the bias curve against Murata's data before ordering.", SPEC="X5R 6.3V +-10% 0201 0.47uF; KE15D was a typo, KE90D is the live number"
  C123: MANF#=GRM033R61A104KE15D, SPEC="X5R 10V +-10% 0201 0.1uF, 0.30 mm max -- moved 2026-09-16 from the L7 bead to U1's VCCADC/GNDADC balls: UG480 Fig 6-1 Note 1 puts the 100 nF as close as possible to the package balls, the 470 nF (C124) at the bead"
C124: library part C-USC0402, "CAPACITOR, American symbol", DeviceName=C0402, DeviceSetName=C-US, GateName_1=G$1, LibraryName=rcl, MANF=Samsung, MANF#=CL05A474KO5NNNC, SPEC="X5R 16V +-10% 0402 0.47uF, 0.55 mm max; replaced GRM155R61C474KA88D (a number no distributor knows) on 2026-09-07", SymbolName_1=C-US
J1: library part PINHD-2X6, "PIN HEADER 2x6 (Pmod)   Digilent peripheral-module connector. Pins 1-4 and 7-10 are signals, 5 and 11 are GND, 6 and 12 are VCC -- eight signals, not twelve.", DeviceSetName=PINHD-2X6, GateName_1=G$1, LibraryName=ctambe, MANF=Sullins, MANF#=PPTC062LFBN-RC, NOTE="A SOCKET, NOT PINS, AND THE LIBRARY NAME DISAGREES WITH THAT. The package is called PIN HEADER 2x6 and the deviceset PINHD-2X6, which is inherited naming, but on a Digilent Pmod the HOST carries the female socket and the peripheral module carries the male pins that plug into it. Cmod A7 is the same. Order male pins off that library name and no Pmod will mate. The footprint is 12 plated holes on 2.54 either way, so a male header such as Sullins PRPC006DAAN-RC drops into the same land if you would rather have pins and a cable. Height 8.5 mm is not a problem: J1 is on the FRONT, and it is the back that faces a breadboard a couple of millimetres away.", SPEC="2x6 female header, 2.54 mm pitch, through-hole, 12 way -- Pmod host socket", SymbolName_1=PINH2X6
JP3 JP4: library part TESTPT-1X3NOSILK, "Three plated holes, 1x3 on 2.54 mm   NOT a fitted header, which is why it is no longer called one. The footprint is an ordinary 1x3 header pattern and a strip could be soldered in for bring-up, but nothing is populated: a 1x3 body clears the Pmod shroud beside it by 0.09 mm, inside anyone's assembly tolerance. Drawn dashed with open holes so the sheet stops reading as a connector, the way the 2x3 it replaced did.", DeviceName=NOSILK, DeviceSetName=TESTPT-1X3, DNS=Yes, GateName_1=A, LibraryName=pinhead, SPEC="DNS - do not stuff: three bare plated holes, 1x3 on 2.54 mm, for flying leads or pogo pins; no part to order (flagged 2026-09-08)", SymbolName_1=TP1X3
  JP3: NOTE="Bare plated holes -- NO HEADER FITTED, nothing to order. Three of the six JTAG holes; JP4 carries the other three, 17.96 mm away on the far side of the Pmod. Each row has 3.05 mm of board to the Pmod but only 0.09 mm to a 1x3 strip's body, so these are for flying leads or a pogo jig. The FT2232 does JTAG over USB on channel B; this is the fallback."
  JP4: NOTE="Bare plated holes -- NO HEADER FITTED, nothing to order. Three of the six JTAG holes; JP3 carries the other three, 17.96 mm away on the far side of the Pmod. Each row has 3.05 mm of board to the Pmod but only 0.09 mm to a 1x3 strip's body, so these are for flying leads or a pogo jig. The FT2232 does JTAG over USB on channel B; this is the fallback."
L1 L2 L3: library part INDUCTOR-2520, "INDUCTOR, generic power inductor", DeviceName=-2520, DeviceSetName=INDUCTOR, GateName_1=G$1, LibraryName=ctambe, MANF=Murata, MANF#=DFE252010P-1R5M=P2, SPEC="1.5uH +-20%, Isat >=1.8A, 1.00 mm max -- SC189 LX inductor, 2.5 MHz, <=0.31 A p-p ripple", SymbolName_1=INDUCTOR
L4 L5 L6 L7: library part INDUCTOR, "INDUCTOR, generic power inductor", DeviceSetName=INDUCTOR, GateName_1=G$1, LibraryName=ctambe, MANF=Murata, MANF#=BLM18KG601SN1D, SPEC="ferrite bead 600 ohm at 100 MHz +-25%, 1.3 A at 85 C, 0.15 ohm max, 0603, 0.90 mm max; replaced BLM18PG601SN1D (a number Murata never made; the spec 600 ohm/1.5 A is BLM18SP601SN1D) on 2026-09-08; L4/L5 feed the FT2232H VPHY/VPLL (60 mA max), L6 GNDADC, L7 VCCADC (25 mA)", SymbolName_1=INDUCTOR
LD0: library part LED_RGB, "RGB LED, three independent diodes, 6 pads: anodes 1/3/5 (B/R/G), cathodes 2/4/6 (B/R/G). Everlight 19-337 package.", B=B, DeviceSetName=LED_RGB, G=G, GateName_1=G$1, LibraryName=ctambe, MANF=Everlight, MANF#=EAST1616RGBA8, NOTE="Everlight EAST1616RGBA8 = 19-337/R6GHBHW-A01/2T (DSE-0009126 Rev.3, 22-Dec-2016); water-clear twin EAST1616RGBA4 = 19-337/R6GHBHC-A01/2T. Same body, lens and recommended pads as the Victory VS NRD8 it replaces (0.55 x 0.4 outer pads at +-0.725 mm, 0.7 x 0.5 middle, 1.9 / 2.2 mm spans) and the same arrangement: cathodes in the left column under the cathode mark, blue / red / green top to bottom, anodes on the right. Only the numbering differs (Everlight anodes 1/3/5 on the right, cathodes 2/4/6 on the left), so on 2026-09-08 the pins were renumbered 1/2/3 -> 2/4/6 and 4/5/6 -> 1/3/5 with the nets unchanged: LED0_B/R/G on the cathodes to the FPGA, N$LD0B/R/G on the anodes through R80/R81/R82. Footprint EVERLIGHT-19-337 = the VS-NRD8 pattern with Everlight pad numbers. Digi-Key 15,840 in stock at $0.43 on 2026-09-08.", R=R, SPEC="RGB LED, three independent diodes, 1.6 x 1.6 x 0.35 mm, diffused lens, 624 / 525 / 468 nm, VF typ 2.05 / 3.2 / 3.2 V (max 2.4 / 3.7 / 3.7), IF 25 mA max per colour; anodes 1 B, 3 R, 5 G, cathodes 2 B, 4 R, 6 G (19-337 sheet p8); replaced the distributor-less Victory VS NRD8 on 2026-09-08", SymbolName_1=LED_RGB
LD1 LD2 LD3 LD4 LD5: library part LED, "LED", DeviceSetName=LED, GateName_1=G$1, LibraryName=ctambe, MANF=Lite-On, SymbolName_1=LED
  LD1: MANF#=LTST-C191KRKT, NOTE="User status LED, driven straight off an FPGA pin through R83 at 330R: (3.3 - Vf)/330 is 3.9 mA green, 4.2 red, 3.6 yellow, and 1.2 mA blue or white. Any of the first three is comfortable and well inside an LVCMOS33 pin's 12 mA. RED IS A PREFERENCE, NOT A CONSTRAINT -- the circuit takes green just as happily. It is red so that the two user LEDs read differently from LD5, which is green and means power good; on a board being brought up that is worth being able to tell apart at a glance. Same LTST-C191 family and the same 0603 land as LD5, so it is one line in the catalogue, not two. Confirm the suffix before ordering.", SPEC="red indicator, 0603, Vf 2.1V max at 4mA"
  LD2: MANF#=LTST-C191KRKT, NOTE="User status LED, driven straight off an FPGA pin through R84 at 330R: (3.3 - Vf)/330 is 3.9 mA green, 4.2 red, 3.6 yellow, and 1.2 mA blue or white. Any of the first three is comfortable and well inside an LVCMOS33 pin's 12 mA. RED IS A PREFERENCE, NOT A CONSTRAINT -- the circuit takes green just as happily. It is red so that the two user LEDs read differently from LD5, which is green and means power good; on a board being brought up that is worth being able to tell apart at a glance. Same LTST-C191 family and the same 0603 land as LD5, so it is one line in the catalogue, not two. Confirm the suffix before ordering.", SPEC="red indicator, 0603, Vf 2.1V max at 4mA"
  LD3: MANF#=LTST-C191KGKT, NOTE="Charger power-good: bq24232 PGOOD sinks LD3 through R107 1.5k from VU when a valid USB input is present", SPEC="green indicator, 0603, Vf 2.1V max at 2mA"
  LD4: MANF#=LTST-C191KRKT, NOTE="Charging: bq24232 CHG sinks LD4 through R108 1.5k from VU while the battery charges, off when done or disabled", SPEC="red indicator, 0603, Vf 2.0V typ at 2mA"
  LD5: MANF#=LTST-C191KGKT, NOTE="Power-good indicator: VCC3V3 to LD5 to R78 680R to Q2 drain to GND. SELECTED FROM THE CIRCUIT, not recovered -- the part carried no value and no number. THE RESISTOR ALREADY CHOSE THE COLOUR: 680R off 3.3 V passes (3.3 - Vf)/680, which is 1.9 mA for a green LED or 2.1 for a red, but only 0.6 mA for a blue or white one, too dim to read. So it is a green or red part, and green is the convention for power good. 1.9 mA is low but plain on a modern high-efficiency 0603; take R78 to 330R if you want it brighter.", SPEC="green indicator, 0603, Vf 2.1V max at 2mA"
Q1: library part OSC_CHIPASEM1-12MHZ, "Crystal Chip", DeviceName=ECS-3225SMV, DeviceSetName=OSC_CHIP, GateName_1=G$1, LibraryName=ctambe, MANF=ECS, MANF#=ECS-3225SMV-120-FP-TR, NOTE="ACTIVE OSCILLATOR, NOT A CRYSTAL -- the schematic settles it: pin 2 to GND, pin 4 to VCC3V3, pin 3 out into R24 and R25, and pin 1 tied to VCC3V3, which is a 4-pad XO with its enable held high. A crystal would have two pads and load capacitors. THE FREQUENCY IS NOT A CHOICE: the FT2232H wants 12 MHz for its USB PLL, so that was fixed before anything else. 25 ppm is the value already recorded and is comfortably inside what FTDI asks of the reference. Output drives two loads through 33R each, the FT2232's OSCI and the FPGA clock ball. Pin 1 to Vdd suits either an OE part or one with pin 1 not connected, so the choice is not narrowed by it. ASEM1 is the family the design note already named. Confirm the suffix -- it encodes stability and temperature range and is the easy thing to get wrong.", SPEC="12.000 MHz HCMOS XO, 1.62-3.63 V, +-10 ppm incl. initial, temp -40..105 C, supply, load, reflow and aging (ECS-3225SMV sheet p1), 3.2x2.5x1.2 mm, pin 1 tri-state (H/NC = run), 6 mA typ / 10 mA max; replaced the +-50 ppm ASEM1-12.000MHZ-LC-T on 2026-09-08", SymbolName_1=OSC_CHIP
R1: library part RES2742, "Resistor 2-pack   Package of two resistors.", DeviceName=742, DeviceSetName=RES2, GateName_1=A, GateName_2=B, LibraryName=ctambe, MANF=CTS, MANF#=742C043472JP, NOTE="The two configuration pull-ups in one package: A on INIT_B (net FPGA-INIT#), B on PROGRAM_B (net RST#). Both commons are pads 3 and 4, side by side on one long side of the body, and both go to VCC3V3. CTS publishes ONE recommended land pattern for the whole 742 package family, so this footprint is the 742C083 pad cell already validated for R34 with two pads per side instead of four. 5 percent: the 742C043 has no 1 percent option either, and a configuration pull-up does not care; 63 mW per element against the 2.3 mW that 3.3 V across 4.7 k actually dissipates. Alternate on the identical land: Panasonic EXB-V4V472JV, same 1.60 x 1.60 mm concave body on 0.80 mm pitch. Do NOT substitute EXB-34V472JV -- same size, convex terminals, different land. R99, the third 4.7 k pull-up on this sheet, stays discrete: it sits on PROG#, the far side of the 100 ohm now in R4. TOLERANCE AGAINST UG470: Table 2-4 asks for a pull-up of 4.7 kohm OR LESS on both of these pins, and this is a 5 percent part, so its worst case is 4.935 k -- 5 percent outside the stated maximum. That is a wording problem rather than a physical one. The limit exists to hold the pin high against input leakage, and DS181 worst-case leakage of 15 uA across 4.935 k is 74 mV, against a VIH of 2.0 V. The discretes this replaces were 1 percent parts and were already outside the same limit, at 4.747 k. Strict compliance would mean 4.3 kohm +-5 percent (4.515 k worst case), but CTS does not stock a 432 code in the 742C043 family -- the stocked spread is 101, 220, 470, 471, 472, 473, 102, 103 and 104 -- so buying compliance here would cost availability, which is the thing that actually stops a board getting built. Dropping to the next stocked value, 1 k, would cost margin where it matters: it lifts the low level the bridge can assert on RST# through the 100 ohm from 0.10 V to 0.43 V.", SPEC="2 x 4.7K +-5% isolated array, 0606 concave 1.60 x 1.60 mm, 0.80 mm pitch, 63 mW per element", SymbolName_1=R1NV0, SymbolName_2=R1NV0
R2 R6 R7: library part R-WIDER0201, "RESISTOR, one element on the 0.4 in symbol   Same R1NV0 symbol the RES4 and RES8 arrays drew their elements with, so a part split out of an array keeps the exact symbol, pin span and position it had on the sheet and not one wire has to move. The 0.2 in R-US_SMALL symbol would have shifted both pins by 2.54 mm and stranded every net that touched them.", DeviceName=R0201, DeviceSetName=R-WIDE, GateName_1=G$1, LibraryName=rcl, MANF=Yageo, MANF#=RC0201FR-074K7L, SPEC="thick film +-1%, 1/20W, 0201", SymbolName_1=R1NV0
R4: library part RES8742, "Resistor 8-pack   Package of eight resistors, six used.", DeviceName=742, DeviceSetName=RES8, GateName_1=A, GateName_2=B, GateName_3=C, GateName_4=D, GateName_5=E, GateName_6=F, GateName_7=G, GateName_8=H, LibraryName=ctambe, MANF=CTS, MANF#=742C163101JP, NOTE="The six 100 ohm series resistors between the FT2232H and the FPGA in one package: A PROG#, B DONE, C TDI, D TDO, E TMS, F TCK, in the order they are drawn down the sheet. Pads 1-6 face the bridge and pads 16-11 face the FPGA, one long side of the body per end of the link. TWO ELEMENTS ARE SPARE (pads 7-10); they sit at the far end of the body, so the six used run contiguously from pad 1. Leave the spare pads unconnected. There is no purchasable 6-element part: CTS 753123101GP is a genuine 12-terminal, 6-isolated-element, 100 ohm array, but Digi-Key holds none, quotes 28 weeks at MOQ 1000 and $2.63 each, and its 12-SRT body is 8.76 x 2.03 mm, LARGER than this 8-element chip array. Same CTS 74x concave family as R34, so all three arrays on the board answer to one CTS land-pattern rule (0.45 x 0.80 mm pads, 0.80 mm pitch, 2.60 mm across). 5 percent like R34: the 742C163 has no 1 percent option, which series damping does not care about, and 63 mW per element is twenty times the worst case. Alternate if the layout needs the length back: Panasonic EXB-2HV101JV is the same 8 x 100 ohm isolated in 3.80 x 1.60 mm, but convex terminals on 0.50 mm pitch, so it needs its own land pattern. AT LAYOUT: all six lines now converge on one part -- put it between the bridge and the FPGA where the four JTAG lines already run together, and keep TCK, element F on pads 6/11, at the end of the body: its only live neighbour is TMS. SUPPLY CAVEATS, all read 2026-09-09. (1) CTS files the whole 74x series -- this part and R34's 742C083 with it -- under Legacy Products on its own site. Near-term risk is low: 25,352 stocked, MOQ 1, deep sibling stock. It is not a young family. (2) There is no drop-in second source on this land. The alternate above needs its own footprint, so this one package is a single point of failure where the six discretes it replaces had many interchangeable vendors; if that matters for the build, qualify a second 16-pad 0.80 mm concave array on the same land first. (3) Every stock and price figure here is Digi-Key alone -- Mouser, Arrow, TTI, Octopart and LCSC all refused automated reads that day -- so none of it has second-distributor corroboration. AND ONE LAYOUT POINT: the two spare elements are unplaced, so pads 7-10 carry no net. If the layout wants them as grounded metal beside TCK, that has to come back here as two more placed gates with both ends on GND; it cannot be done in the PCB alone.", SPEC="8 x 100 ohm +-5% isolated array, 2506 concave 6.40 x 1.60 mm, 0.80 mm pitch, 63 mW per element; six elements used, two spare", SymbolName_1=R1NV0, SymbolName_2=R1NV0, SymbolName_3=R1NV0, SymbolName_4=R1NV0, SymbolName_5=R1NV0, SymbolName_6=R1NV0, SymbolName_7=R1NV0, SymbolName_8=R1NV0
R5 R10 R11 R12 R13 R14 R15 R16 R17: library part R-US_R0201, "RESISTOR, American symbol", DeviceName=R0201, DeviceSetName=R-US_, GateName_1=G$1, LibraryName=rcl, MANF=Yageo, SPEC="thick film +-1%, 1/20W, 0201", SymbolName_1=R-US
  R5: MANF#=RC0201FR-075K1L, MOUSER#=301-5.1K-RC
  R10 R14: MANF#=RC0201FR-072K32L
  R11 R15: MANF#=RC0201FR-071KL
  R12 R16: MANF#=RC0201FR-07140RL
  R13 R17: MANF#=RC0201FR-07845RL
R18 R21 R78 R80 R81 R82 R83 R84 R85 R86 R102 R103 R104 R105 R106 R107 R108: library part R-US_SMALLR0402, "RESISTOR, American symbol, small 2-zigzag variant (sheet 2 only)", DeviceName=R0402, DeviceSetName=R-US_SMALL, GateName_1=G$1, LibraryName=rcl, MANF=Yageo, SymbolName_1=R-US_SMALL
  R18: MANF#=RC0402FR-0712KL, NOTE="Stays 0402 deliberately. Power is trivial (0.9 mW) and 1 percent is 1 percent at any size, but this is the FT2232's RREF -- it sets the USB transceiver bias current. There is no space pressure on this board any more, so there is nothing to gain against a part whose drift shows up as USB signal quality.", SPEC="thick film +-1%, 1/16W, 0402"
  R21: MANF#=RC0402FR-071KL, SPEC="thick film +-1%, 1/16W, 0402"
  R78: MANF#=RC0402FR-07680RL, SPEC="thick film +-1%, 1/16W, 0402"
  R80 R82: MANF#=RC0402FR-0733RL, NOTE="RGB LED balance. The green and blue dice are 3.3 V-class parts on a 3.3 V rail, so the resistor never dominates their current -- that is structural and no resistor value fixes it. What the values CAN do is stop red swamping the other two. As built, and as Cmod A7 ships the same LED, 182/182/100 gave red 6.9 mA against green 1.9 and blue 1.5: red about four times either. At 330/33/33 it is red 3.8, green 2.9, blue 2.9. Worst case improves too, not just nominal -- green with a part 0.15 V high in Vf goes from 1.4 mA to 1.8. Lower resistors do make the current MORE sensitive in percentage terms, 77 percent of nominal retained at 100R against 61 at 33R, but the absolute floor is what you see and it rises. Currents read off the datasheet's own Vf/If curve at the working point, not off the 20 mA table.", SPEC="thick film +-1%, 1/16W, 0402"